# Altium PCB AP33771.PcbDoc
Units mm, origin at the board's own origin, x right, y up, seen from the top; angles counter-clockwise.
Board outline 164 x 114 mm, 8 copper layers (Top Layer, Power, Inner 1, Inner 2, Inner 3, Inner 4, Ground, Bottom Layer), stack 1.564 mm thick; 3 components, 6 nets, 59 pads, 16 vias.
Unrouted connection lines stored in the file: 8.
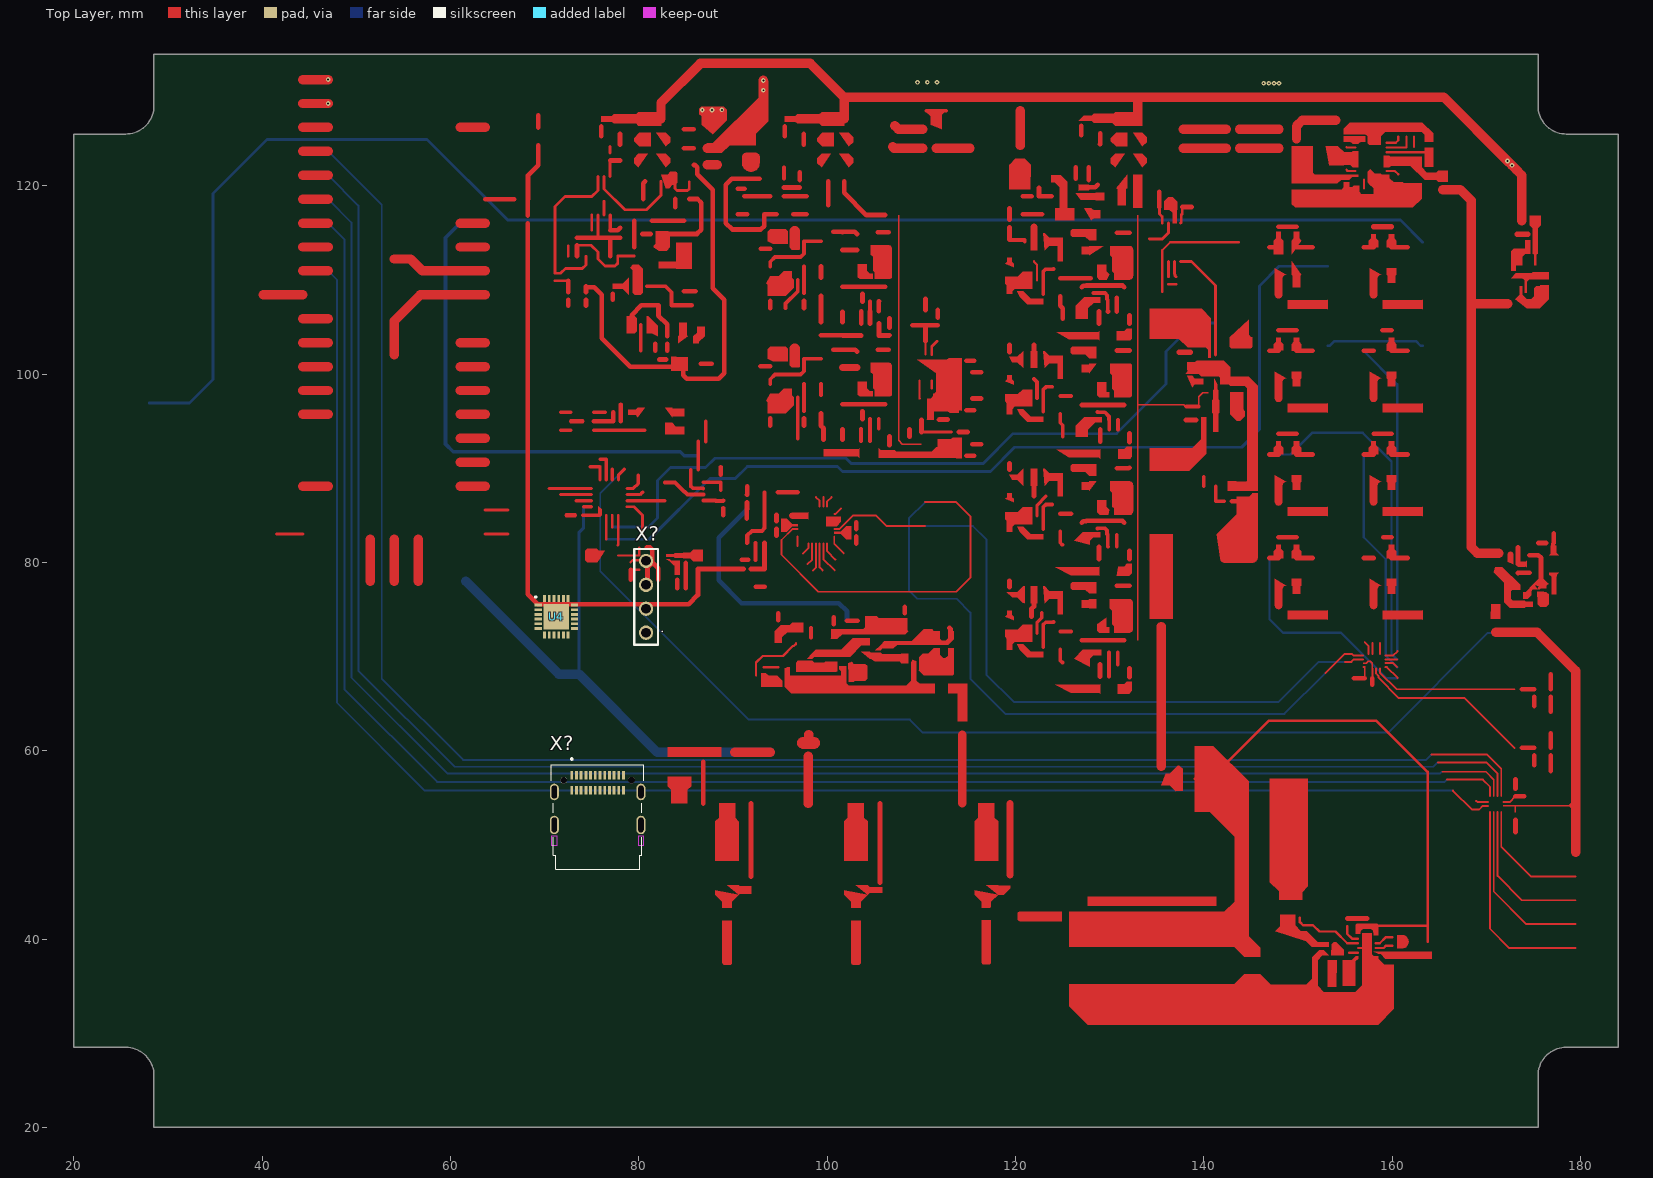
[diagram p0: Top Layer view]
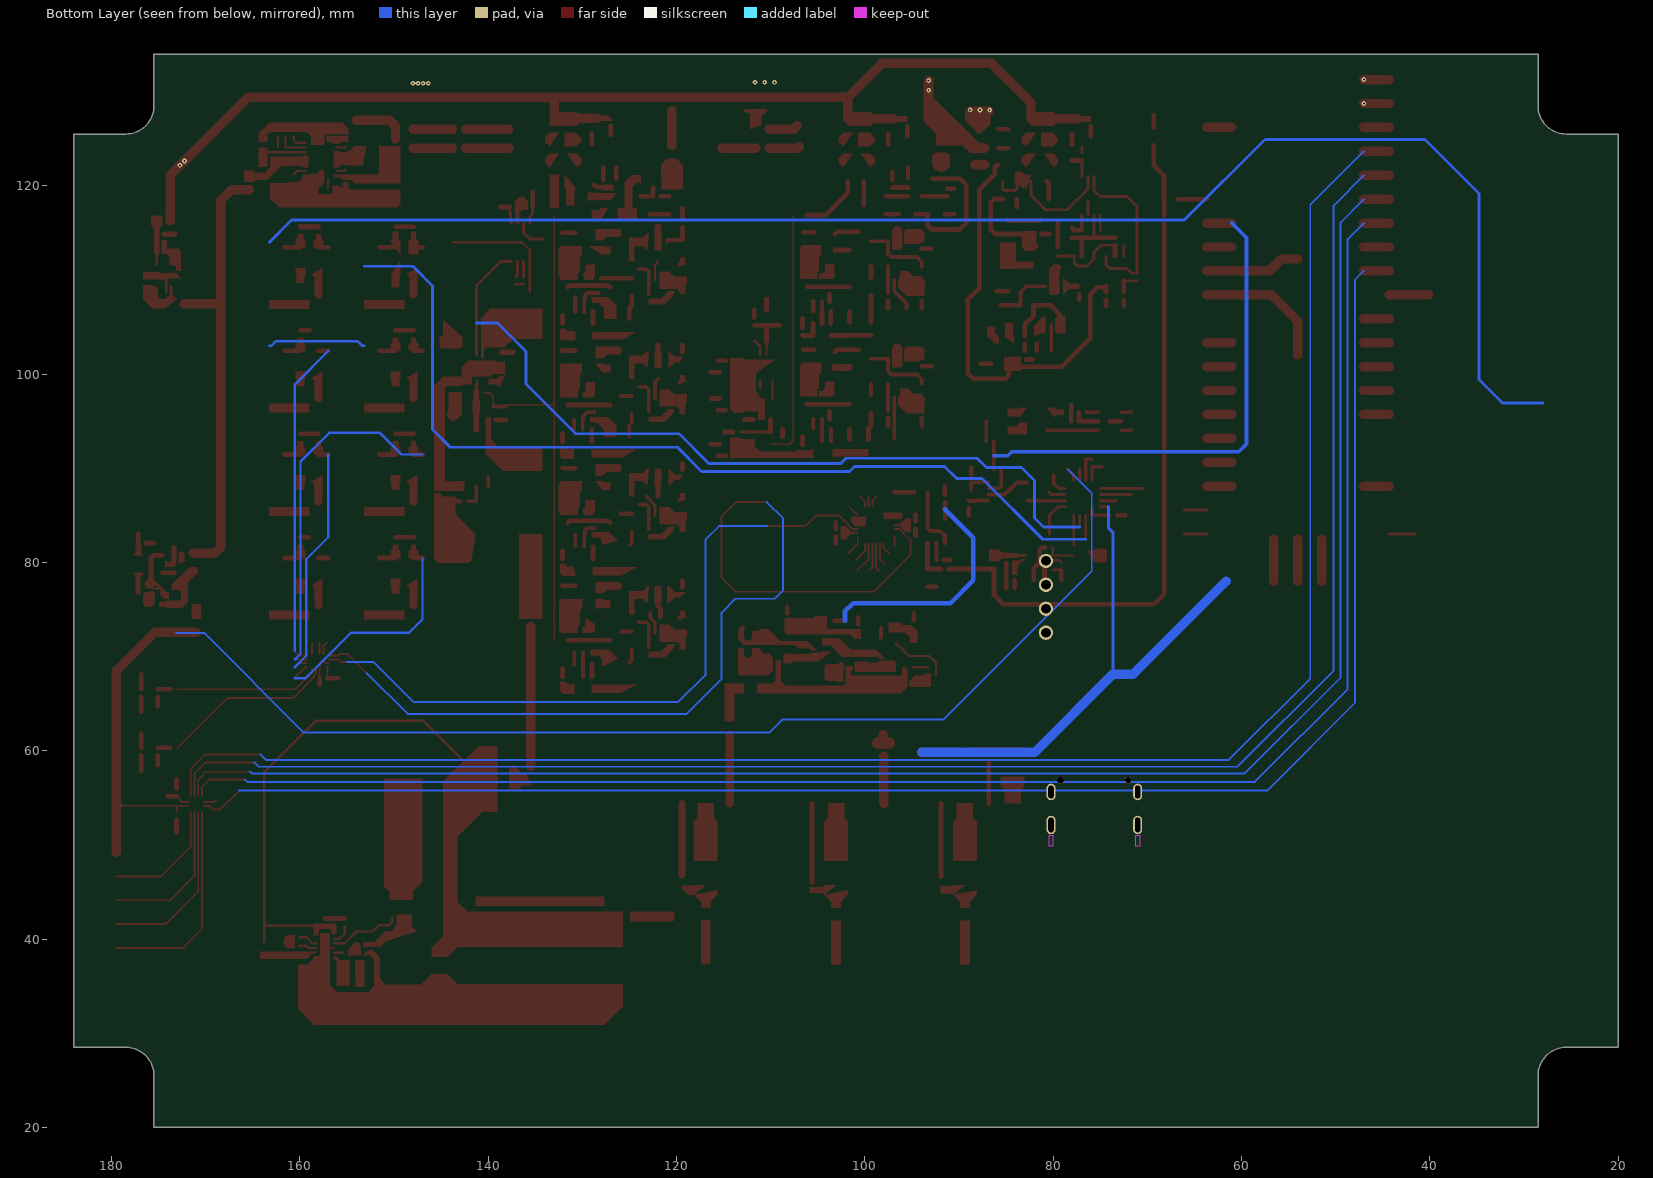
[diagram p1: Bottom Layer view, seen from below]
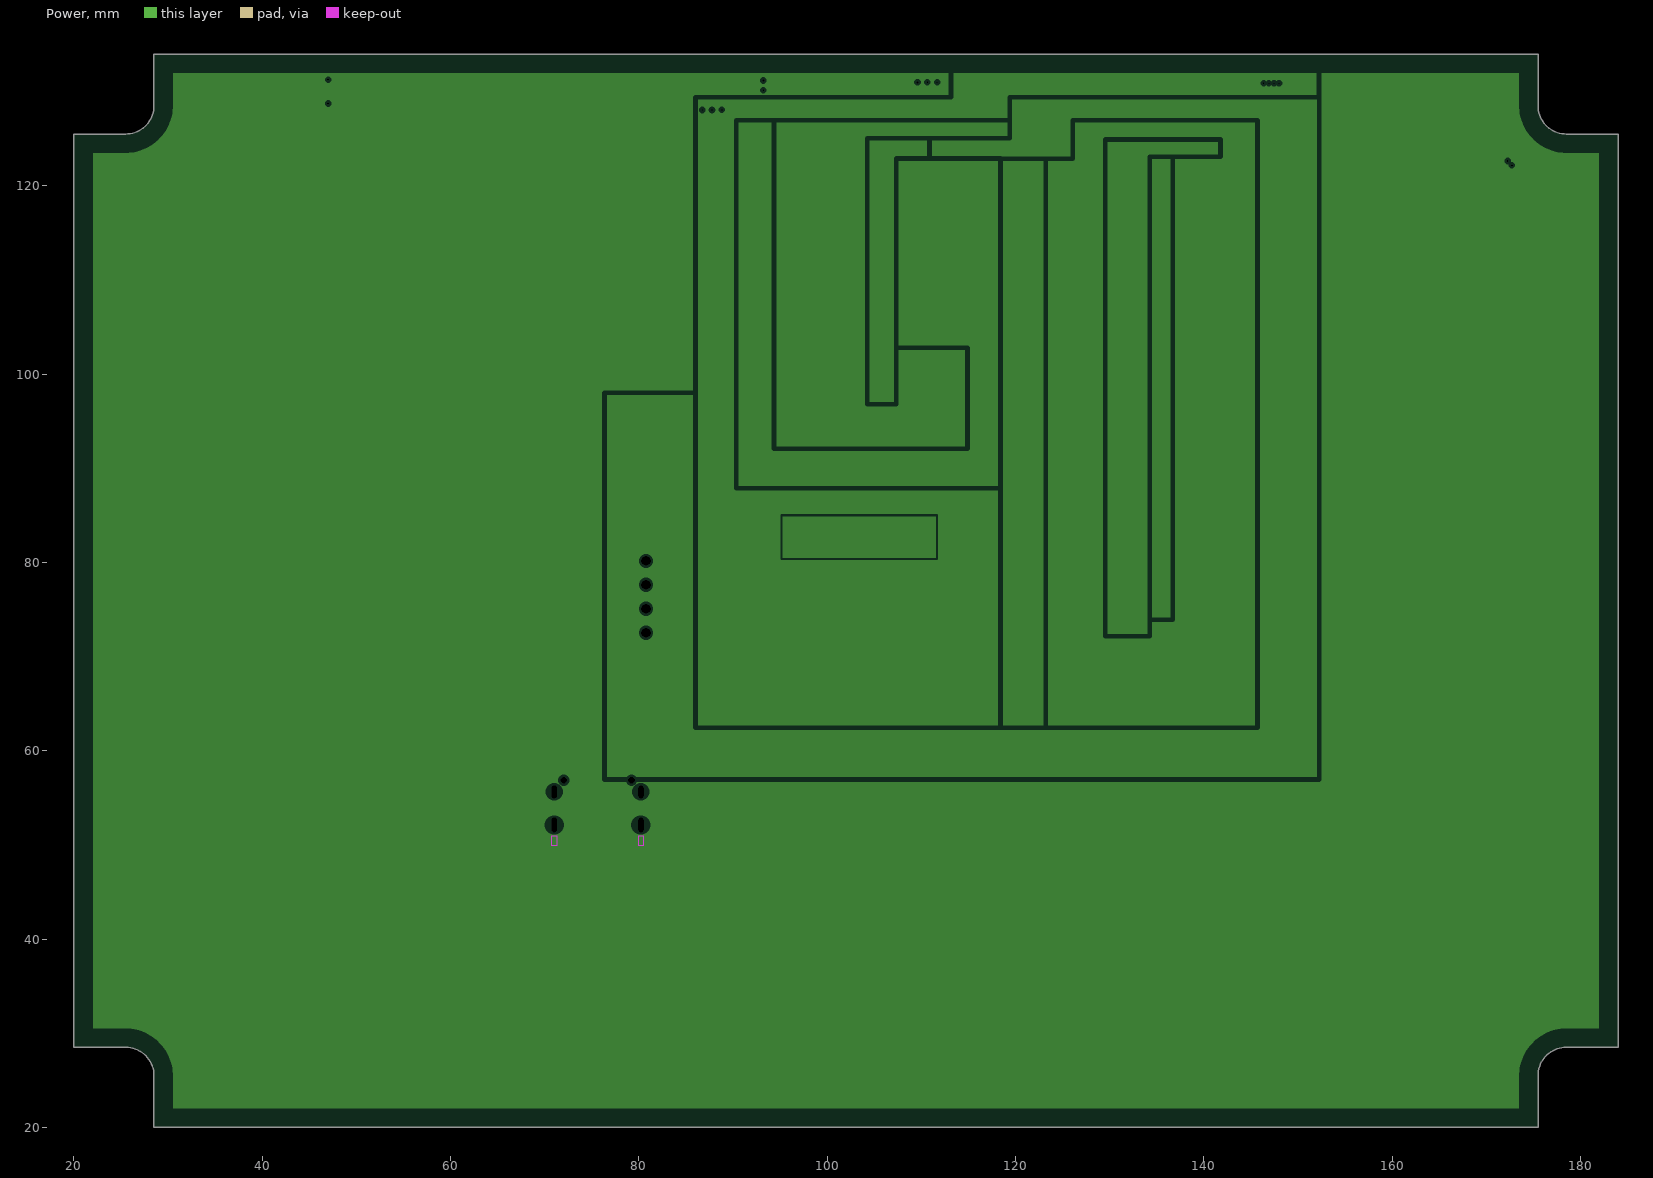
[diagram p2: Power, clearances drawn from the general rule]
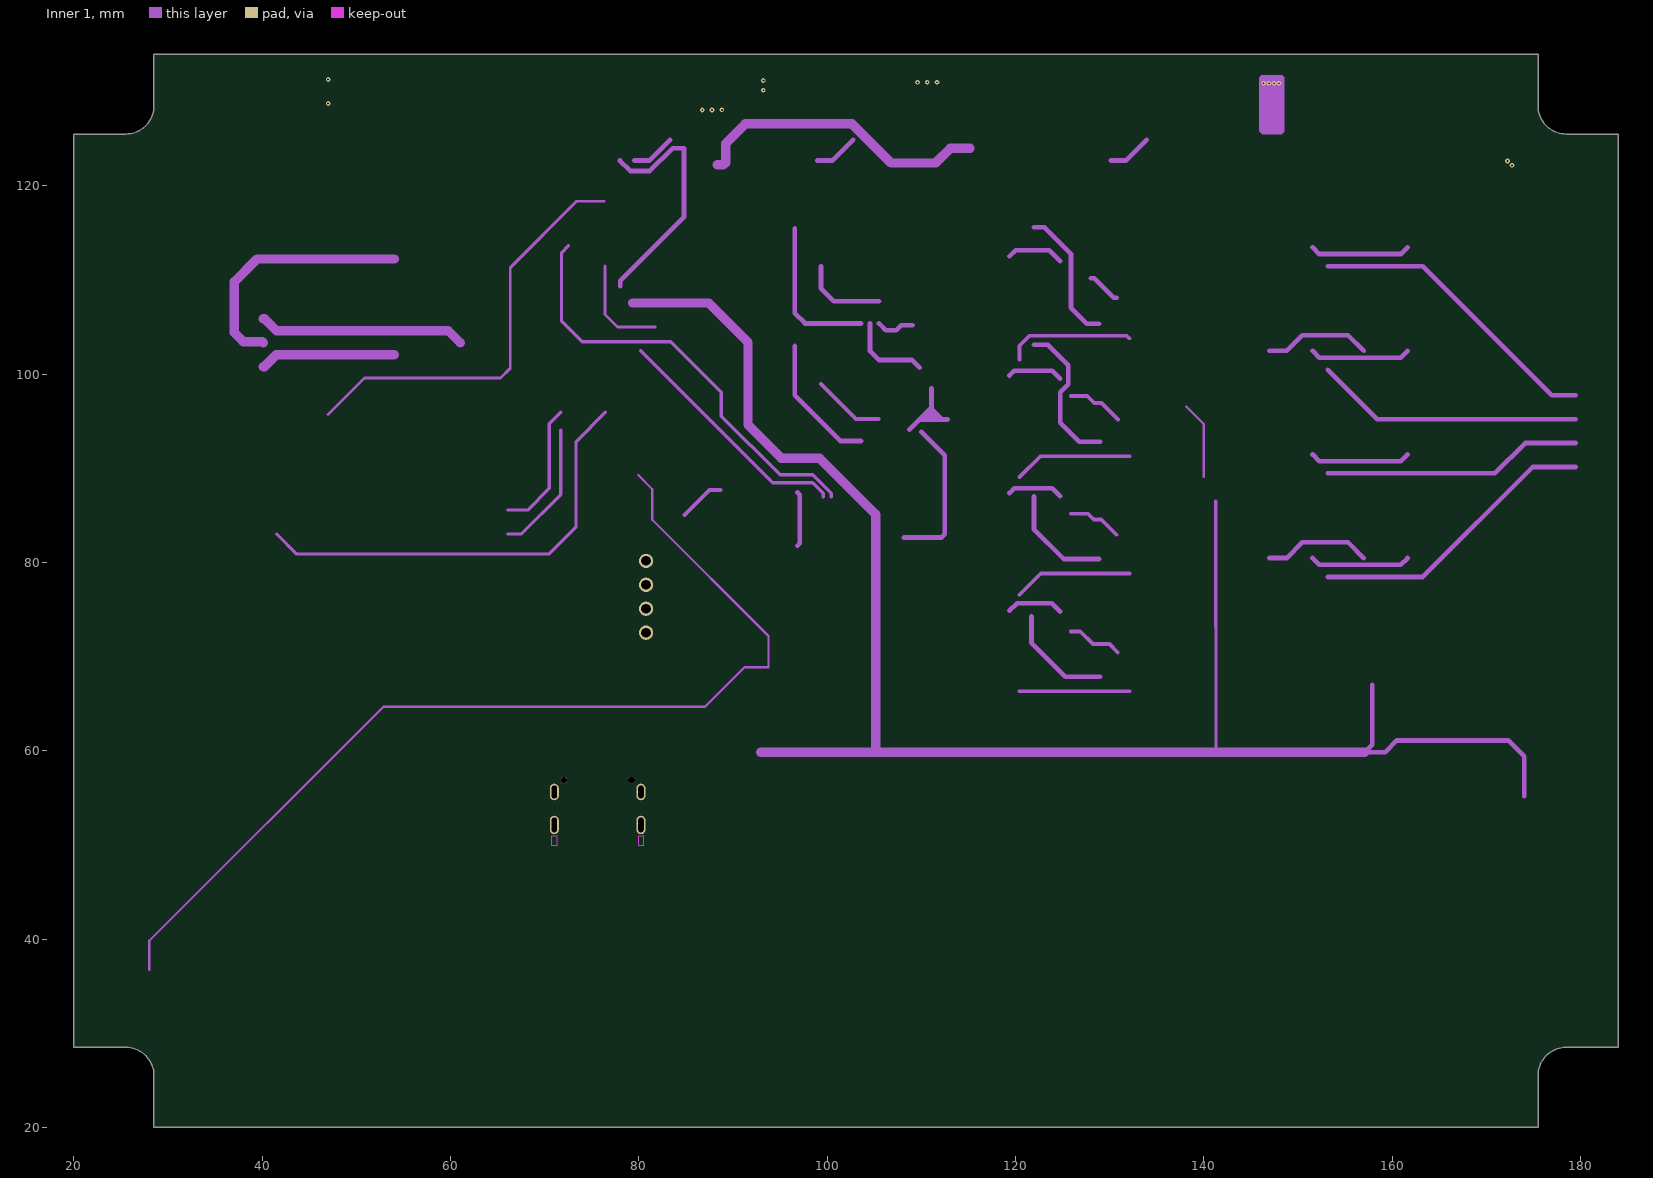
[diagram p3: Inner 1]
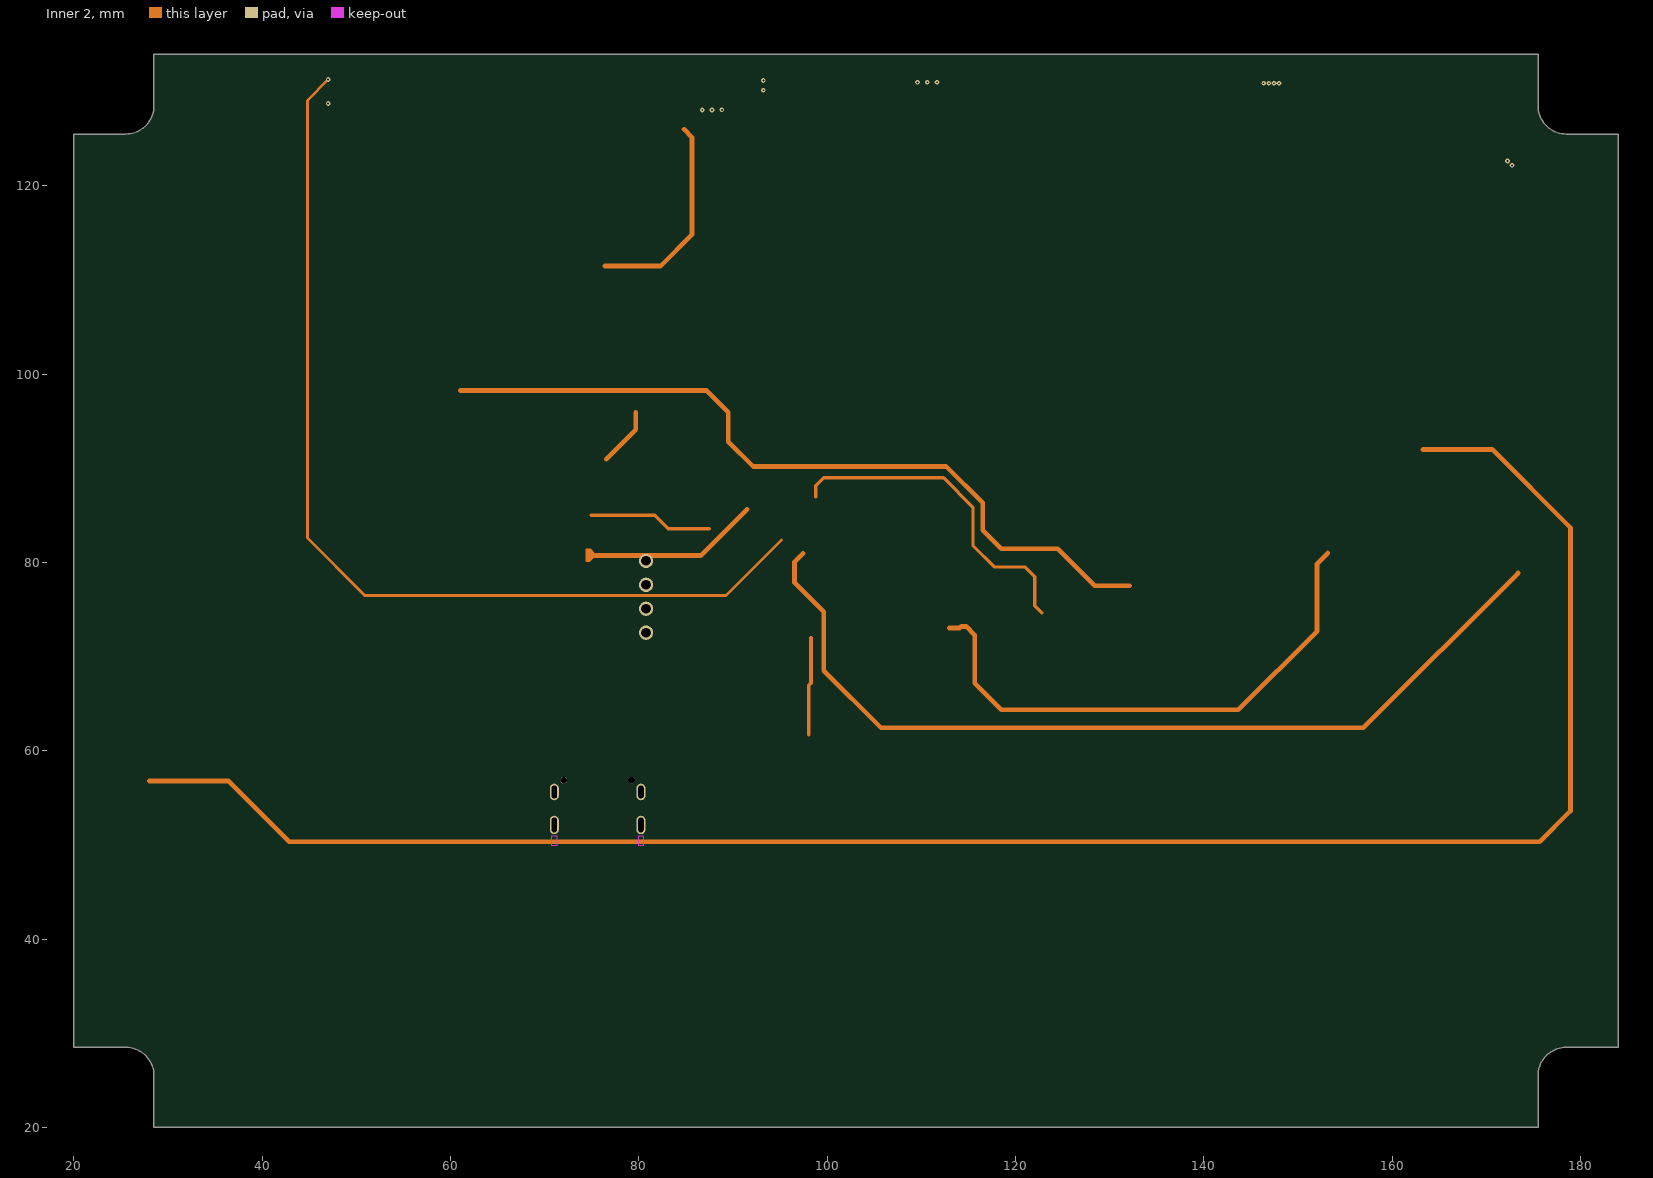
[diagram p4: Inner 2]
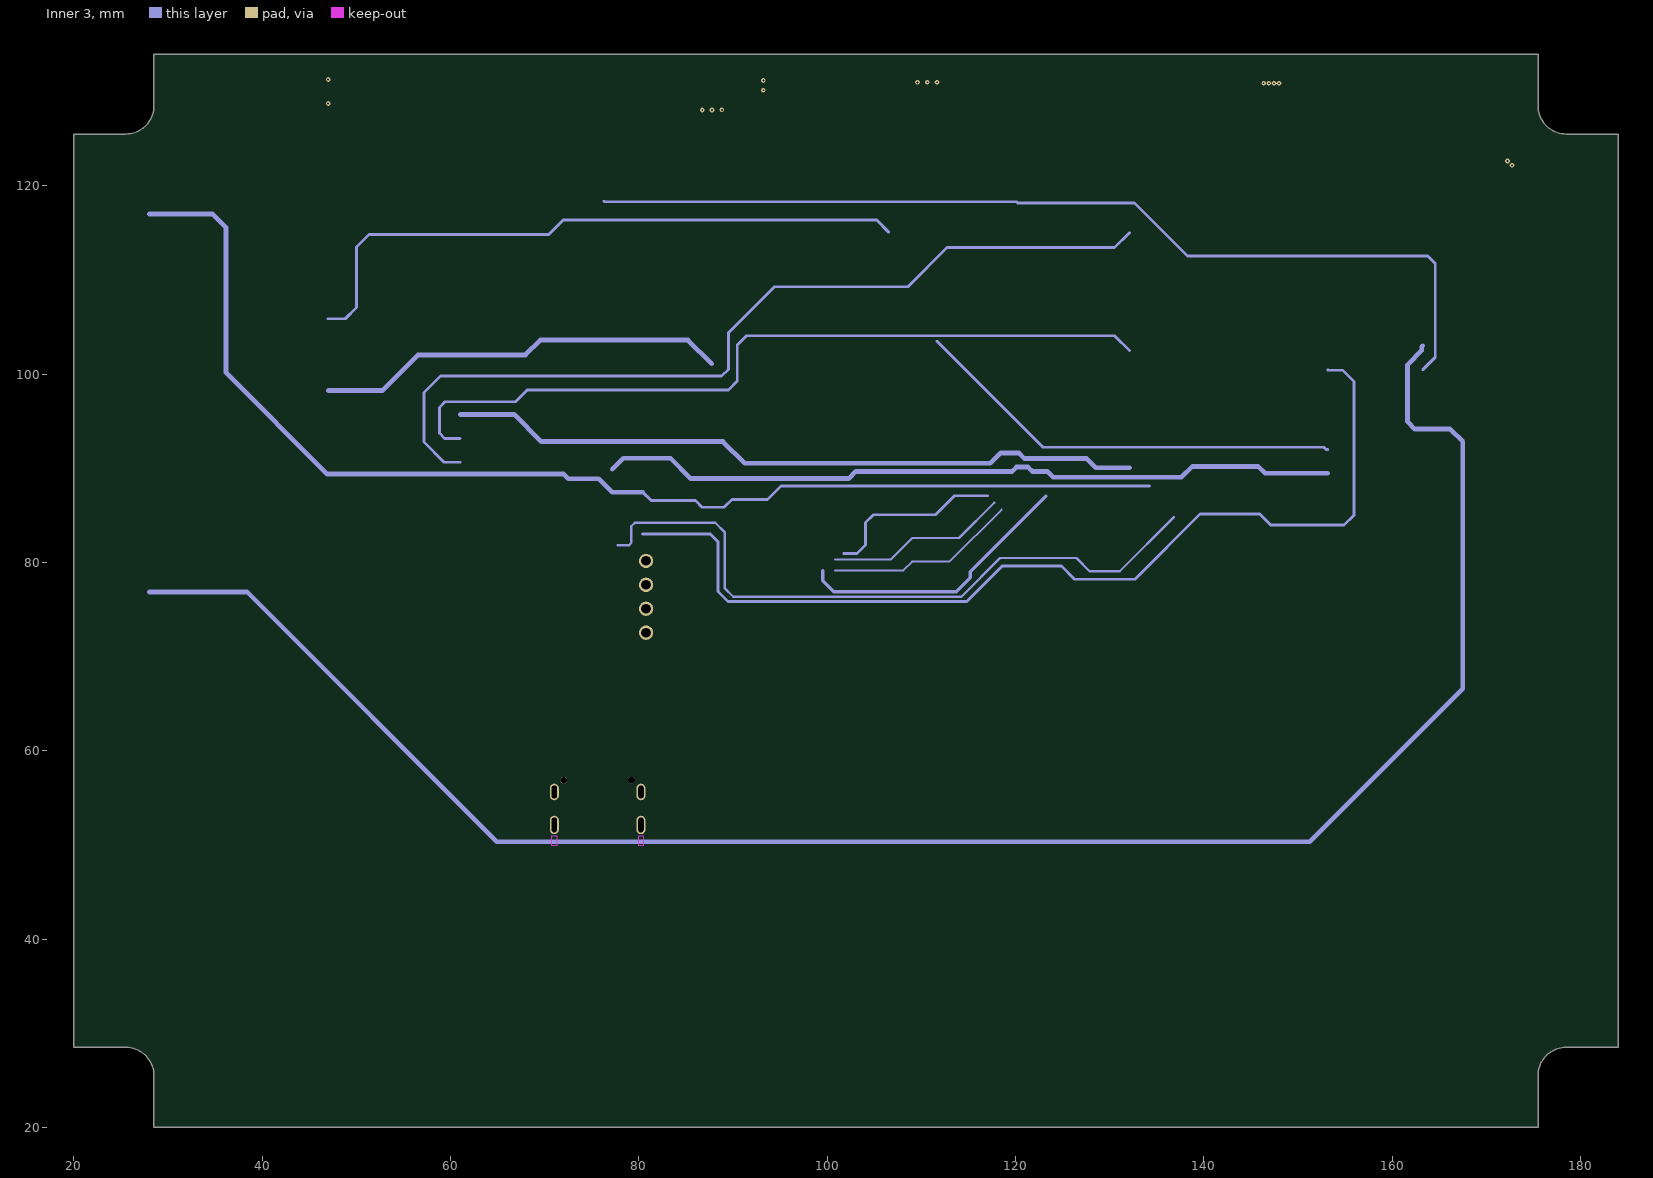
[diagram p5: Inner 3]
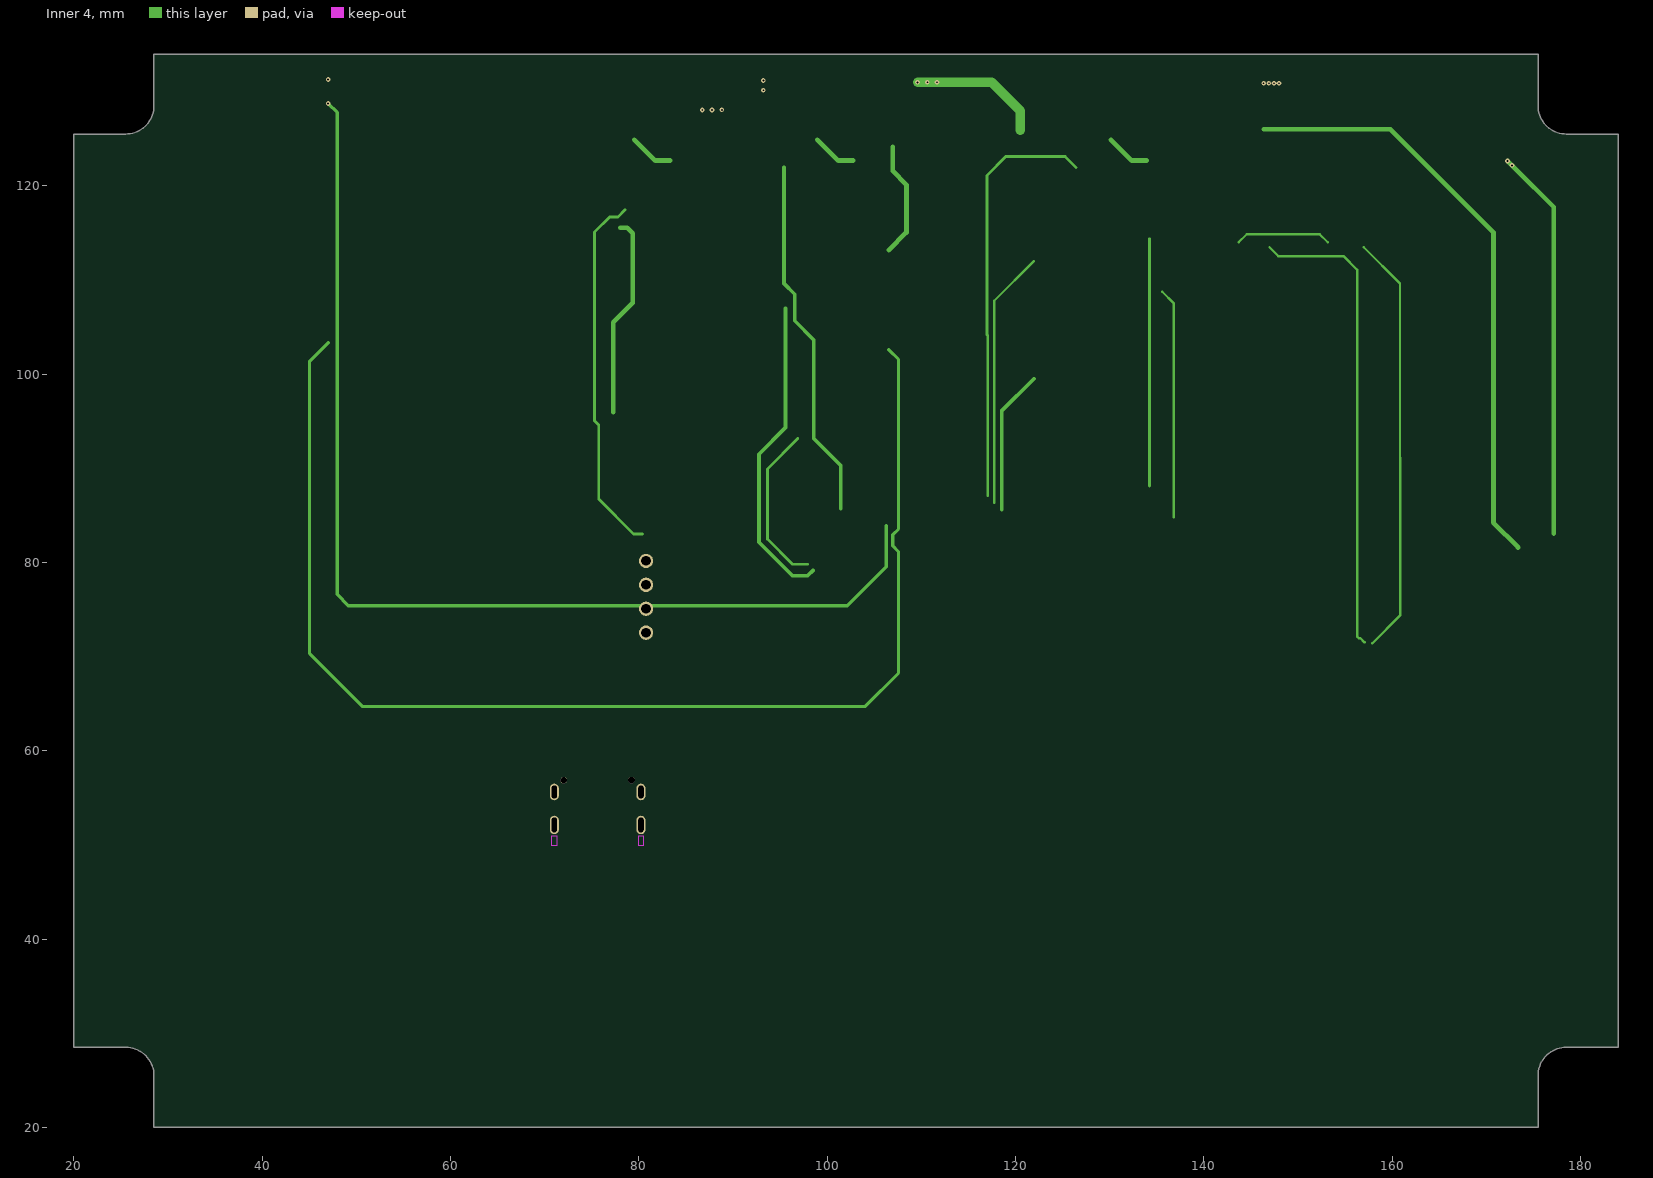
[diagram p6: Inner 4]
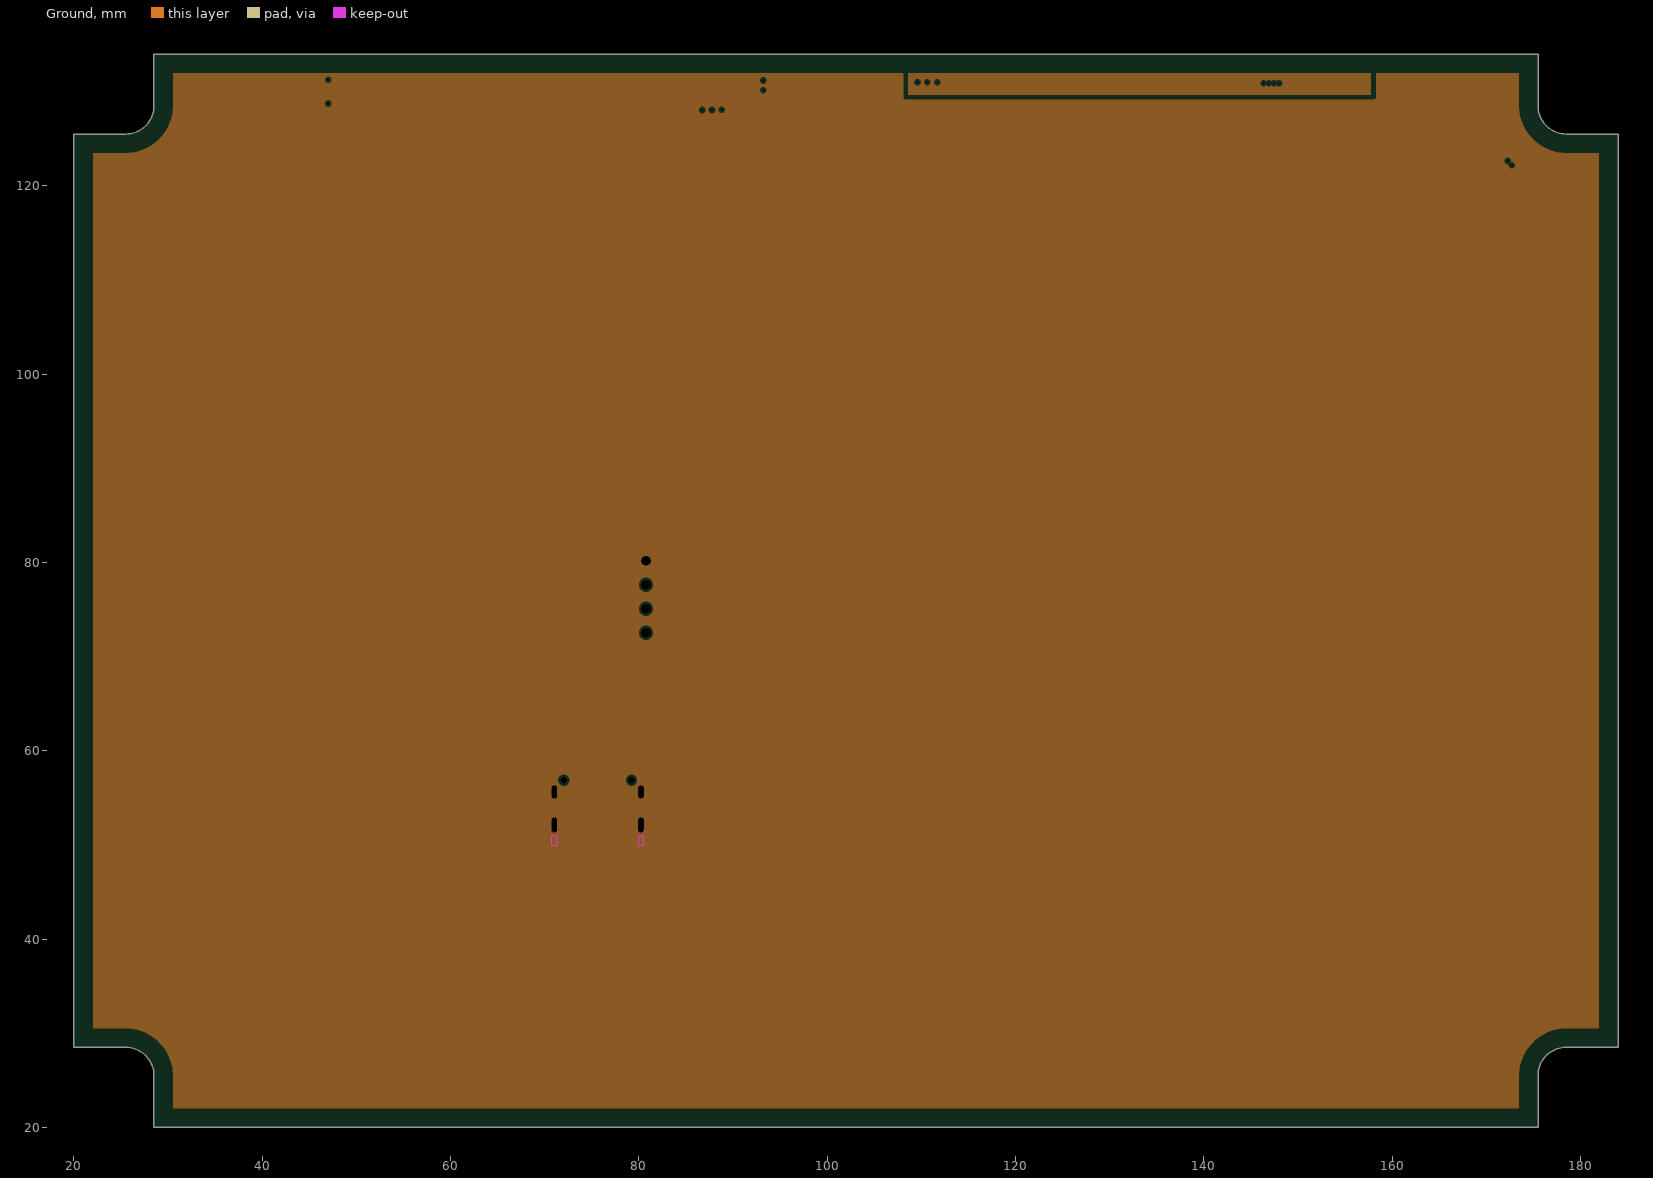
[diagram p7: Ground, clearances drawn from the general rule]

## Layer stack, top to bottom
Top Solder: solder mask 0.0102, Solder Resist, Dk 3.5
Top Layer: signal copper 0.035
Dielectric 1: prepreg 0.114, 1x2116, Dk 4
Power: plane copper 0.035
Dielectric 2: core 0.2, 0.2mm, Dk 4
Inner 1: signal copper 0.035
Dielectric 3: prepreg 0.228, 2x2116, Dk 4
Inner 2: signal copper 0.035
Dielectric 4: core 0.2, 0.2mm, Dk 4
Inner 3: signal copper 0.035
Dielectric 5: prepreg 0.228, 2x2116, Dk 4
Inner 4: signal copper 0.035
Dielectric 6: core 0.2, 0.2mm, Dk 4
Ground: plane copper 0.035, net GND
Dielectric 7: prepreg 0.114, 1x2116, Dk 4
Bottom Layer: signal copper 0.035
Bottom Solder: solder mask 0.0102, Solder Resist, Dk 3.5

## Board outline
20,28.5 25.5,28.5 cw(c25.5,25.5) 28.5,25.5 28.5,20 175.5,20 175.5,25.5 cw(c178.5,25.5) 178.5,28.5 184,28.5 184,125.5 178.5,125.5 cw(c178.5,128.5) 175.5,128.5 175.5,134 28.5,134 28.5,128.5 cw(c25.5,128.5) 25.5,125.5 20,125.5

## Design rules (kind name [scope] priority, off if disabled: settings)
Clearance [All] p1: gap=0.15 ignorepadtopadclearanceinfootprint=TRUE
DiffPairsRouting [All] p1: maxlimit=10 minlimit=0.125 mostfreqgap=0.15 toplayer_minwidth=0.381 toplayer_maxwidth=0.381 toplayer_prefwidth=0.381 midlayer1_minwidth=0.381 midlayer1_maxwidth=0.381 midlayer1_prefwidth=0.381 midlayer2_minwidth=0.381 midlayer2_maxwidth=0.381 midlayer2_prefwidth=0.381 midlayer3_minwidth=0.381 midlayer3_maxwidth=0.381 midlayer3_prefwidth=0.381 midlayer4_minwidth=0.381 midlayer4_maxwidth=0.381 midlayer4_prefwidth=0.381 bottomlayer_minwidth=0.381 bottomlayer_maxwidth=0.381 bottomlayer_prefwidth=0.381 maxuncoupledlength=12.7
FabricationTestPointUsage FabricationTestPointUsage_1 [All] p1: valid=0 allowmultiple=FALSE
FabricationTestpoint FabricationTestpoint_1 [All] p1: side=3 testpointundercomponent=TRUE minsize=1.016 maxsize=2.54 preferedsize=1.524 minholesize=0 maxholesize=1.016 preferedholesize=0.813 testpointgrid=0.025 allowsidetop=TRUE allowsidebottom=TRUE usegrid=TRUE gridtolerance=0
HoleSize [All] p1: absolutevalues=TRUE maxlimit=6 minlimit=0.1 maxpercent=80.000 minpercent=20.000
HoleSize FabricationTestpoint [All] p2 off: absolutevalues=TRUE maxlimit=2.54 minlimit=0.025 maxpercent=80.000 minpercent=20.000
HoleSize FabricationTestPointUsage [All] p3 off: absolutevalues=TRUE maxlimit=2.54 minlimit=0.025 maxpercent=80.000 minpercent=20.000
MinimumSolderMaskSliver [All] p1: minsoldermaskwidth=0.07
MinimumSolderMaskSliver SilkscreenOverComponentPads [All] p2: minsoldermaskwidth=0.254
PlaneClearance [All] p1: clearance=0.254
PlaneConnect [All] p1: planeconnectstyle=Direct reliefexpansion=0.4 reliefentries=4 reliefconductorwidth=0.15 reliefairgap=0.15
PolygonConnect [All] p1: connectstyle=Direct reliefconductorwidth=0.15 reliefentries=4 polygonreliefangle="90 Angle" airgapwidth=0.254
RoutingCorners [All] p1: cornerstyle=45-Degree minsetback=1.25 maxsetback=1.25
RoutingVias [All] p1: holewidth=0.3 width=0.6 viastyle="Through Hole" minholewidth=0.2 minwidth=0.45 maxholewidth=0.45 maxwidth=0.75
SilkToSilkClearance [All] p1: silktosilkclearance=0.15
SilkToSolderMaskClearance [IsPad] p1: minsilkscreentomaskgap=0.12 clearancetoexposedcopper=TRUE
SolderMaskExpansion [All] p1: expansion=0.03 istentingtop=FALSE
Width [All] p1: maxlimit=10 minlimit=0.1 preferedwidth=0.15 toplayer_prefwidth=0.125 midlayer1_minwidth=0.125 midlayer2_minwidth=0.125 midlayer3_minwidth=0.125 midlayer4_minwidth=0.125 bottomlayer_prefwidth=0.125 minimp=50.000000 maximp=50.000000 favimp=50.000000
20 further rules are at their usual default settings.

## Classes and differential pairs
component class AP33771: U4 X?

## Components (designator, comment, footprint, x,y, rotation, side; value= is the part's Value field where it differs from the comment)
U4 "AP33771" W-QFN4040-24 71.24,74.23 r0 top
X? "HMTSW-104-07-G-S-240" HDR_TH_1X4_M_00 80.76,76.35 r90 top value=HDR_TH_1X4_M_00
X? "USBC" 10163259-00011LF 75.62,52.12 r0 top value=10163259-00011LF

## Footprints (in the part's own frame and the unit in brackets; to place one, negate y for a bottom-side part, rotate by r counter-clockwise, add the part's x,y. Pads: shape width x height; smd on the part's side, far side on the other; paste and mask are expansions set on the pad)
10163259-00011LF [mm] "USBC connector"
  rect 0.3x0.9 smd mask+0.05: A1(-2.75,5.3) A2(-2.25,5.3) A3(-1.75,5.3) A4(-1.25,5.3) A5(-0.75,5.3) A6(-0.25,5.3) A7(0.25,5.3) A8(0.75,5.3) A9(1.25,5.3) A10(1.75,5.3) A11(2.25,5.3) A12(2.75,5.3) B1(2.75,3.7) B2(2.25,3.7) B3(1.75,3.7) B4(1.25,3.7) B5(0.75,3.7) B6(0.25,3.7) B7(-0.25,3.7) B8(-0.75,3.7) B9(-1.25,3.7) B10(-1.75,3.7) B11(-2.25,3.7) B12(-2.75,3.7)
  oval 0.96x1.76 hole 0.55 slot 1.35 at 90 deg: SH1(-4.6,3.5) SH2(4.6,3.5)
  oval 0.96x1.96 hole 0.55 slot 1.55 at 90 deg: SH3(-4.6,0) SH4(4.6,0)
  round 0.7 hole 0.7 unplated: ""(-3.6,4.75) ""(3.6,4.75)
  Keep-Out Layer region: 4.85,-2.195 4.35,-2.195 4.35,-1.145 4.85,-1.145
  Keep-Out Layer region: -4.35,-2.195 -4.85,-2.195 -4.85,-1.145 -4.35,-1.145
  silkscreen extent -4.92,-4.7 4.92,7.1, body extent -4.92,-4.7 4.92,6.4, height 5.19
HDR_TH_1X4_M_00 [mil] "Header; 1x4 pins; Male; Straight; Pitch 2.54mm; Samtec HMTSW Series"
  round 60 hole 40 paste-99999 mask+1.97: 1(-150,0) 2(-50,0) 3(50,0) 4(150,0)
  silkscreen extent -200,-50 200,50, body extent -200,-49 200,49, height 340
W-QFN4040-24 [mm] "Diodes inc."
  rect 2.7x2.7 smd paste-2539.97 mask+0.05: 0(0,0)
  rect 0.75x0.3 smd paste-2539.97 mask+0.05: 1(-1.925,1.25) 2(-1.925,0.75) 3(-1.925,0.25) 4(-1.925,-0.25) 5(-1.925,-0.75) 6(-1.925,-1.25) 13(1.925,-1.25) 14(1.925,-0.75) 15(1.925,-0.25) 16(1.925,0.25) 17(1.925,0.75) 18(1.925,1.25)
  rect 0.3x0.75 smd paste-2539.97 mask+0.05: 7(-1.25,-1.925) 8(-0.75,-1.925) 9(-0.25,-1.925) 10(0.25,-1.925) 11(0.75,-1.925) 12(1.25,-1.925) 19(1.25,1.925) 20(0.75,1.925) 21(0.25,1.925) 22(-0.25,1.925) 23(-0.75,1.925) 24(-1.25,1.925)
  silkscreen extent -2.3,2 -2.1,2.2, body extent -1.99,-1.99 1.99,1.99, height 1.4

## Part data
U4: "USB PD SINK CONTROLLER", Manufacturer="Diodes Incorporated", Manufacturer Part Number=AP33771DKZ-13, Supplier Part Number 1=31-AP33771DKZ-13CT-ND, ComponentLink1Description=Datasheet, ComponentLink1URL=https://www.diodes.com/assets/Datasheets/AP33771.pdf, ComponentLink2Description="Supplier Info", ComponentLink2URL=https://www.digikey.de/en/products/detail/diodes-incorporated/AP33771DKZ-13/15995287, Supplier 1=DigiKey
X?: library part HDR_TH_1X4_M_00, "Header; 1x4 pins; Male; Straight; Pitch 2.54mm; Samtec HMTSW Series", Manufacturer="Samtec Inc.", Supplier Part Number 1=HMTSW-104-07-G-S-240-ND, ComponentLink1Description="Supplier Info", ComponentLink1URL=https://www.digikey.de/en/products/detail/samtec-inc/HMTSW-104-07-G-S-240/8450698, ComponentLink2Description=Datasheet, ComponentLink2URL=https://mm.digikey.com/Volume0/opasdata/d220001/medias/docus/6129/hmtsw-xxx-xx-xxx-x-xxxx-xx-xx-mkt.pdf, Manufacturer Part Number=HMTSW-104-07-G-S-240, Supplier 1=Digi-Key
X?: library part 10163259-00011LF, "USB 3.2 TYPE C GEN 2 RECEPTACLE", Manufacturer="Amphenol ICC (FCI)", Supplier Part Number 1=609-10163259-00011LFCT-ND, ComponentLink1Description=Datasheet, ComponentLink1URL=https://cdn.amphenol-cs.com/media/wysiwyg/files/documentation/datasheet/inputoutput/io_usb_type_c_connector_cable.pdf, ComponentLink2Description="Supplier Info", ComponentLink2URL=https://www.digikey.de/en/products/detail/amphenol-cs-fci/10163259-00011LF/18443707, Manufacturer Part Number=10163259-00011LF, Supplier 1=DigiKey

## Via types
v1: diameter 0.508, hole 0.203, Top Layer to Bottom Layer, tented both sides, 16 vias

## Nets (pads, with @x,y where several pads share a name; then routed paths per layer and width w, separated by ;. In a path a pad name is that pad's centre, name@x,y a point inside that pad or via, vN(x,y) a via of type N, cw(c..) or ccw(c..) an arc to the next point about the centre after c; other vN are vias at no path point)
CC1: U4.17 X?.A5
CC2: U4.16 X?.B5
D+: X?.3 X?.A6
D-: X?.2 X?.A7
GND: X?.4 X?.A1 X?.A12 X?.B1 X?.B12 X?.SH1 X?.SH2 X?.SH3 X?.SH4 | length 1.2
  Top Layer w0.45: 72.781,94.988 74,94.988
VBUS: X?.1 X?.A4 X?.A9 X?.B4 X?.B9
pads on no net: U4.0 U4.1 U4.2 U4.3 U4.4 U4.5 U4.6 U4.7 U4.8 U4.9 U4.10 U4.11 U4.12 U4.13 U4.14 U4.15 U4.18 U4.19 U4.20 U4.21 U4.22 U4.23 U4.24 X?. X?.A2 X?.A3 X?.A8 X?.A10 X?.A11 X?.B2 X?.B3 X?.B6 X?.B7 X?.B8 X?.B10 X?.B11
copper on no net: | length 6957.9
  Top Layer w0.15: 107.577,116.892 107.577,109.289 107.577,96.809 107.577,92.973 107.986,92.564 108.749,92.564 108.753,92.568 110.009,92.568 ; 132.987,71.726 132.987,84.226 132.987,96.726 ; 132.987,116.85 132.987,109.225 132.987,96.726 ; 138.134,96.557 138.037,96.557 137.868,96.726 132.987,96.726 ; 139.459,96.557 139.464,96.562 139.464,97.613 139.864,98.013 140.459,98.013 ; 156.933,69.3 156.946,69.313 157.277,69.313 157.464,69.5 157.702,69.5 157.902,69.3 157.902,68.732 ; 171.826,54.144 173.1,54.144 ; 173.1,53.442 173.1,54.144 ; 179.435,59 179.5,59.065 ; 179.5,54.134 179.49,54.144 173.1,54.144
  Top Layer w0.2: 96.85,81.761 96.85,82.761 ; 96.85,83.561 96.328,83.561 95.15,82.383 95.15,80.811 99.071,76.89 113.71,76.89 115.21,78.39 115.21,84.893 113.693,86.41 110.4,86.41 ; 97.439,80.96 98,81.521 98,82.011 ; 97.9,79.811 98.4,80.311 98.4,82.011 ; 98.5,79.15 98.8,79.45 98.8,82.011 ; 98.8,86.94 99.2,86.54 99.2,85.911 ; 99.2,82.011 99.2,79.47 99.52,79.15 ; 99.6,82.011 99.6,80.35 100.8,79.15 ; 99.6,85.911 99.6,86.94 ; 100,82.011 100,81.186 100.875,80.311 ; 100,85.911 100,86.477 100.463,86.94 ; 100.75,82.761 100.75,81.97 101.76,80.96 ; 100.75,83.561 101.325,83.561 102.764,85 105.18,85 106.29,83.89 110.38,83.89 110.4,83.87 ; 100.75,85.161 100.9,85.161 101.45,85.711 ; 152.9,68.25 154.918,70.269 155.744,70.269 155.913,70.1 156.933,70.1 ; 155,69.44 155.684,69.44 155.944,69.7 156.933,69.7 ; 156.933,68.9 157.089,68.9 157.102,68.888 157.102,67.7 ; 157.1,71.54 157.1,71.514 157.502,71.112 157.502,70.269 ; 157.902,67.7 157.902,68.732 ; 157.902,70.269 157.902,71.425 ; 158.302,68.732 158.302,68.204 158.539,67.966 158.539,67.781 160.72,65.6 167.704,65.6 173,60.304 ; 158.702,68.732 158.714,68.719 158.714,68.286 160.472,66.528 173,66.528 ; 158.702,70.269 158.702,71.419 158.708,71.425 ; 159.27,68.9 159.283,68.888 159.452,68.888 160.577,67.762 160.577,67.7 ; 159.27,69.3 160.126,69.3 160.539,68.888 ; 159.27,69.7 160.539,69.7 ; 159.27,70.1 160.089,70.1 160.577,70.589 160.577,70.596 ; 164.2,59.621 170.051,59.621 171.6,58.072 171.6,55.169 ; 164.86,58.77 170,58.77 171.2,57.57 171.2,55.169 ; 165.36,57.77 169.975,57.77 170.8,56.945 170.8,55.169 ; 165.84,56.93 169.65,56.93 170.4,56.18 170.4,55.169 ; 166.46,55.77 168.49,53.74 169.23,53.74 169.634,54.144 170.175,54.144 ; 168.907,54.662 168.991,54.662 169.108,54.544 170.175,54.544 ; 170.4,53.518 170.4,41.1 172.458,39.042 179.5,39.042 ; 170.8,53.518 170.8,45.05 174.268,41.582 179.5,41.582 ; 171.2,53.518 171.2,46.7 173.778,44.122 179.5,44.122 ; 171.6,53.518 171.6,49.8 174.738,46.662 179.5,46.662 ; 171.826,54.544 172.475,54.544 173.1,55.169
  Top Layer w0.24: 77.778,80.734 80.03,80.734 80.03,81.584 ; 79.124,79.234 80.03,79.234 ; 79.124,80.034 79.317,80.227 80.023,80.227 80.03,80.234 ; 92.45,67.995 92.45,68.864 92.45,69.364 93.15,70.064 95.299,70.064 96.35,71.115 96.459,71.115 96.69,71.346 96.69,71.455 ; 93.25,68.864 93.77,68.864 94.81,68.864 ; 155.15,121.696 155.27,121.576 156.125,121.576 ; 155.15,124.101 155.175,124.076 156.125,124.076 ; 157.025,119.725 157.025,120.676 ; 159.425,121.576 160.295,121.576 160.65,121.22 ; 159.425,123.576 163.825,123.576 163.9,123.65 ; 159.425,124.076 161.475,124.076 161.525,124.125 161.525,125.2 ; 159.425,124.576 160.387,124.576 160.65,124.838 160.65,125.2 ; 162.325,124.125 162.325,125.2
  Top Layer w0.25: 109.8,99.287 109.8,97.437 ccw(c109.828,97.437) 109.828,97.409 ; 110.45,102.087 110.45,103.496 ; 111.092,98.51 111.092,99.287 111.1,99.287 ; 121.963,112.015 121.963,111.945 122.288,111.62 122.288,109.97 ; 150.205,42.292 150.205,41.8 150.53,41.475 151.6,41.475 152.275,40.8 153.98,40.8 155.23,39.55 156.38,39.55 ; 155.243,41.375 155.243,40.55 155.743,40.05 156.38,40.05 ; 155.43,38.55 156.38,38.55 ; 156.38,39.05 157.08,39.05 157.33,39.3 ; 158.28,39.05 159.105,39.05 159.355,39.3 160.05,39.3 ; 158.28,39.55 158.68,39.55 159.305,40.175 160.022,40.175
  Top Layer w0.254: 77.778,81.834 77.804,81.86 77.804,84.987 77.83,85.013 ; 135.594,108.75 135.594,113.159 136.435,114 141.259,114 143.7,114 ; 139.03,57 140.68,58.65 142.35,58.65 146.871,63.171 158.349,63.171 163.77,57.75 163.77,41.4 ; 158.11,41.4 163.77,41.4 ; 163.77,39.7 163.77,41.4
  Top Layer w0.3: 71.1,109.923 72.495,109.923 ; 72.495,112.514 72.495,113.621 ; 73.425,113.694 74.927,113.694 75.65,112.971 75.65,112.236 76.402,111.484 77.457,111.484 77.75,111.778 77.75,112.53 77.755,112.535 79.504,112.535 79.509,112.54 ; 74.375,112.514 74.375,111.6 73.994,111.219 72.195,111.219 71.7,110.723 71.1,110.723 71.1,117.79 72.165,118.855 74.989,118.855 75.65,119.516 75.65,121 ; 75,115.294 75,116.911 ; 75.6,114.494 75.65,114.544 75.65,116.911 ; 76.3,116.911 76.3,118.355 ; 76.3,121 76.3,119.678 78.523,117.455 80.812,117.455 82.353,118.997 82.353,120.483 ; 76.53,82.466 76.53,85.013 ; 76.95,121 76.95,122.683 ; 76.95,123.483 76.95,124.186 ; 77.178,83.779 77.179,83.78 77.179,85.012 77.18,85.013 ; 78.73,85.913 79.477,85.913 80.377,85.013 80.377,83.02 ; 83.853,120.402 83.853,119.702 84.053,119.502 85.177,119.502 85.353,119.677 85.353,120.402 ; 111.1,102.087 111.1,102.926 111.67,103.496 ; 134.24,114.38 134.258,114.362 135.596,114.362 136.244,115.009 136.244,116.045 ; 135.282,117.75 135.282,117.025 135.458,116.849 135.463,116.849 135.594,116.718 135.594,116.045 ; 136.244,109.55 137.052,109.55 ; 136.244,110.35 136.244,111.955 ; 136.894,111.955 136.894,110.626 136.952,110.568 136.952,110.45 137.052,110.35 ; 137.544,111.955 138.704,111.955 141.259,109.4 141.259,108.3 141.259,105.423 141.259,102.023 ; 137.544,116.045 137.61,116.111 137.61,116.929 137.706,117.025 137.706,117.75
  Top Layer w0.35: 41.522,83.02 44.32,83.02 ; 63.7,83.02 66.09,83.02 ; 63.7,85.56 66.09,85.56 ; 70.489,87.863 74.98,87.863 ; 71.71,87.213 74.98,87.213 ; 71.71,95.938 72.781,95.938 ; 72.781,94.038 72.78,94.039 71.711,94.039 ; 73.329,86.563 74.98,86.563 ; 74.029,85.013 74.954,85.013 75.88,85.013 ; 74.129,85.913 74.98,85.913 ; 74.845,90.17 75.88,90.17 75.88,88.763 ; 75.219,95.938 76.449,95.938 ; 75.88,90.97 76.53,90.97 76.53,88.763 ; 76.95,115.294 76.95,116.911 ; 77.18,88.763 77.18,89.895 ; 77.83,88.763 77.83,89.276 78.449,89.895 ; 78.73,86.563 82.755,86.563 ; 78.73,87.213 80.13,87.213 80.377,87.46 80.42,87.46 ; 78.73,87.863 79.413,87.863 79.93,88.38 79.93,89.276 ; 80.203,102.482 80.203,105.247 ; 110.009,93.864 113.196,93.864 ; 122.288,72.471 122.288,73.65 122.777,74.138 122.777,74.656 ; 122.288,84.971 122.288,86.075 123.229,87.016 ; 141.259,88.122 141.259,86.5 142.196,86.5 ; 71.71,94.04 71.711,94.039
  Top Layer w0.4: 75.219,94.038 80.6,94.038 ; 80.853,109.336 82.841,109.336 83.48,108.698 83.48,107.31 ; 85.5,89.838 85.5,88.113 85.734,87.879 86.829,87.879 86.845,87.863 ; 86.3,89.838 86.3,91.338 86.3,92.838 ; 86.845,88.513 88.685,88.513 88.685,87.701 ; 87.1,92.838 87.1,94.988 ; 93.954,98.954 93.954,99.454 94.449,99.949 97.169,99.949 97.529,100.308 97.529,101.643 98.451,101.644 99.336,101.644 ; 93.954,111.434 93.954,111.934 94.449,112.429 97.169,112.429 97.529,112.788 97.529,114.124 98.451,114.124 99.336,114.124 ; 95.41,120.761 95.41,121.963 ; 95.579,106.987 95.579,107.489 96.879,108.789 96.879,110.034 ; 96.878,93.152 96.878,96.308 ; 96.879,96.309 96.879,97.554 ; 97.528,96.099 97.528,97.554 97.528,98.954 ; 97.529,108.579 97.529,110.034 97.529,111.434 ; 98.29,71.998 98.29,73.07 ; 99.336,97.759 99.336,98.96 ; 103.606,92.907 103.606,94.202 ; 104.546,106.682 104.546,107.715 ; 104.546,92.907 104.546,94.202 104.546,95.235 ; 105.486,94.202 105.486,95.235 ; 110.545,127.98 111.585,127.98 112.625,127.98 ; 119.363,114.259 120.973,114.259 120.988,114.243 120.988,114.059 ; 121.963,99.516 121.963,99.486 122.288,99.161 122.288,97.471 ; 122.489,119.768 122.496,119.761 ; 122.938,71.016 122.938,72.471 122.954,72.487 122.954,73.396 123.208,73.65 124.022,73.65 124.043,73.671 ; 122.938,83.516 122.938,84.971 122.954,84.987 122.954,85.875 123.229,86.15 123.868,86.15 123.888,86.171 ; 122.938,96.016 122.938,97.471 122.954,97.487 122.954,98.375 123.229,98.65 123.868,98.65 123.888,98.671 ; 122.938,108.515 122.938,109.97 122.954,109.986 122.954,110.915 123.189,111.149 124.022,111.149 124.043,111.17 ; 124.746,70.776 124.746,69.594 124.971,69.369 125.026,69.369 ; 124.746,72.676 125.896,72.676 ; 124.746,83.276 124.746,82.094 124.971,81.869 125.026,81.869 ; 124.746,95.776 124.746,94.843 125.026,94.563 125.026,93.369 ; 124.746,97.676 125.896,97.676 ; 128.273,108.617 129.498,108.617 129.732,108.382 129.732,107.95 129.807,107.875 ; 128.713,83.618 128.721,83.626 129.498,83.626 129.732,83.392 129.732,83.01 129.812,82.93 129.812,81.665 129.817,81.66 ; 128.713,95.976 128.733,95.956 129.492,95.956 129.946,95.502 129.946,95.162 129.956,95.152 129.956,94.119 ; 129.812,106.664 129.812,107.87 ; 129.916,70.435 129.921,70.43 129.921,69.165 129.926,69.16 129.926,67.864 ; 130.757,81.66 130.757,82.93 ; 130.866,69.16 130.866,70.435 ; 130.896,94.119 130.896,95.152 ; 138.134,96.557 139.459,96.557 ; 139.989,88.122 139.989,89.104
  Top Layer w0.43: 86.845,86.563 86.846,86.562 88.157,86.562 88.189,86.53 88.21,86.53 88.225,86.545 88.944,86.545 88.96,86.561 ; 86.845,87.213 85.146,87.213 84.821,87.538 84.8,87.538 83.826,88.512 82.756,88.512 ; 88.96,85.011 88.96,85.761 ; 91.47,82.066 ccw(c91.47,82.106) 91.51,82.106 91.51,82.861 92.01,83.361 93.069,83.361 93.349,83.641 93.349,84.657 93.349,87.44 ; 92.409,80.28 92.409,80.968 92.409,82.066 ; 82.755,88.513 82.756,88.512
  Top Layer w0.45: 72.309,85.013 73.229,85.013 ; 78.075,94.988 78.075,95.938 78.075,96.785 ; 88.685,89.313 88.685,90.138
  Top Layer w0.5: 63.7,118.58 66.764,118.58 ; 68.186,116.04 68.186,76.634 69.274,75.546 85.278,75.546 86.278,76.546 86.278,79.311 91.109,79.311 ; 68.186,116.84 68.186,118.58 68.218,118.612 68.218,121.088 68.25,121.12 69.3,122.17 69.3,124.3 ; 69.3,126.2 69.3,127.488 69.32,127.508 69.32,127.51 ; 72.495,107.261 72.495,107.911 ; 72.495,108.711 72.495,109.923 ; 73.425,113.694 73.43,113.689 73.43,112.519 73.435,112.514 ; 73.425,114.494 74.375,114.494 75,114.494 75.6,114.494 76.1,114.494 76.95,114.494 ; 74.375,107.261 74.375,107.911 ; 74.375,108.711 74.375,109.317 74.456,109.236 75.25,109.236 76.06,108.426 76.06,103.81 79.08,100.79 83.76,100.79 ; 75.219,94.988 75.22,94.989 76.449,94.989 76.45,94.99 76.451,94.989 77.274,94.989 ; 76,125.281 76,126.306 ; 76.95,112.53 76.95,114.494 ; 76.95,115.294 77.773,115.294 78.023,115.544 78.025,115.544 ; 76.95,122.683 77.987,122.683 ; 77.225,107.886 77.225,108.536 ; 77.274,94.989 77.274,95.938 ; 78,124.352 78,125.506 ; 78.025,114.494 76.95,114.494 ; 79.124,78.159 79.124,79.234 ; 79.23,105.89 79.23,106.263 80.275,107.308 82.078,107.308 82.08,107.31 82.08,106.212 83.004,105.288 83.004,104.02 ; 79.503,116.305 79.506,116.302 79.506,113.483 79.509,113.48 ; 80.349,114.894 81.253,114.894 ; 80.453,118.605 80.453,120.283 80.653,120.483 ; 80.83,81.584 81.185,81.584 81.436,81.333 81.436,80.026 81.478,79.984 ; 80.909,78.159 80.909,79.415 81.478,79.984 ; 81.403,116.305 84.803,116.305 ; 81.743,102.482 81.743,103.22 ; 82.063,78.159 82.063,79.398 81.478,79.984 ; 82.18,101.55 82.9,101.55 ; 83.004,102.482 83.004,103.22 ; 83.004,114.894 86.164,114.894 86.62,115.35 86.62,118.208 86.227,118.602 85.353,118.602 ; 83.48,107.308 85.628,107.308 ; 83.853,117.735 83.853,118.602 ; 83.853,120.402 83.853,121.286 ; 84.078,77.27 84.078,78.159 ; 84.678,101.1 84.71,101.068 84.71,99.9 85.11,99.5 88.5,99.5 89.08,100.08 89.08,107.89 87.863,109.107 87.863,119.565 86.189,121.239 86.189,121.97 85.939,122.22 85.839,122.22 ; 84.803,108.8 86.01,108.8 ; 84.803,124 85.84,124 ; 84.803,126 85.838,126 ; 84.978,77.27 84.978,79.934 ; 86.578,101.1 86.579,101.101 87.729,101.101 87.73,101.103 ; 86.836,54.4 86.838,54.402 86.838,58.818 86.84,58.82 ; 90.51,116.981 91.51,116.981 ; 90.51,119.68 91.21,119.68 ; 90.92,80.28 91.609,80.28 ; 91.21,118.88 91.909,118.88 ; 91.47,84.657 91.47,85.634 91.495,85.659 91.495,85.661 91.495,86.401 ; 91.495,87.201 91.518,87.225 91.518,88.077 91.52,88.079 ; 91.909,79.311 93.36,79.311 93.355,79.317 93.355,82.06 93.349,82.066 ; 91.91,118.881 92.819,118.881 93.954,118.881 ; 91.916,46.607 91.916,54.4 ; 92.42,77.411 93.36,77.411 ; 92.819,120.761 89.871,120.761 89.24,120.13 89.24,116.05 89.92,115.37 92.95,115.37 93.31,115.73 93.31,116.981 94.61,116.981 ; 92.92,100.843 93.953,100.843 ; 92.941,113.324 93.954,113.324 ; 93.95,95.3 93.952,95.298 93.952,94.542 93.954,94.541 ; 93.954,106.987 93.954,107.779 ; 94.622,82.836 94.622,83.561 ; 94.622,84.361 94.622,85.061 ; 94.772,87.44 96.85,87.44 ; 94.81,73.87 94.81,74.61 ; 95.41,118.881 97.801,118.881 ; 95.41,119.821 96.347,119.821 97.079,119.821 ; 95.5,125.281 95.5,126.306 ; 96.41,116.981 97.801,116.981 ; 97.079,120.621 97.079,121.432 ; 97.5,124.352 97.5,125.506 ; 97.528,94.541 97.528,95.299 ; 97.529,106.987 97.529,107.779 ; 99.336,95.859 99.336,94.52 99.616,94.24 99.616,93.052 ; 99.336,104.132 101.636,104.132 101.656,104.112 103.586,104.112 103.606,104.091 ; 99.336,105.532 99.336,108.339 ; 99.336,110.239 99.336,111.434 ; 100.101,117.931 100.101,120.483 ; 100.651,102.593 101.636,102.593 102.972,102.593 103.172,102.393 ; 100.651,115.113 100.652,115.111 101.598,115.111 101.636,115.074 101.674,115.113 102.933,115.113 103.172,114.874 ; 100.71,73.45 100.71,74.19 ; 101.636,93.052 101.636,94.152 ; 101.636,96.809 106.154,96.809 ; 101.636,105.532 101.636,106.632 ; 101.636,109.289 106.154,109.289 ; 101.636,113.174 103.172,113.174 ; 101.801,120.483 101.801,119.263 104.172,116.892 106.154,116.892 ; 102.115,73.805 103.217,73.805 ; 103.1,82.011 103.1,82.761 ; 103.1,83.561 103.1,84.261 ; 103.606,105.387 103.606,106.682 ; 103.746,107.715 103.746,108.539 ; 103.746,95.235 103.746,96.059 ; 104.546,105.387 104.546,106.682 ; 105.372,102.593 106.541,102.593 ; 105.372,115.074 106.541,115.074 ; 105.485,104.091 105.504,104.11 ; 105.485,106.682 105.485,107.716 105.506,107.737 105.506,107.739 ; 105.506,105.387 105.504,105.385 105.504,104.11 ; 105.602,46.007 105.602,54.4 ; 106.616,104.132 106.595,104.112 105.506,104.112 105.504,104.11 ; 106.616,104.932 106.616,105.907 ; 106.616,92.452 106.616,93.367 ; 108.25,74.6 108.25,75.26 ; 108.749,93.364 108.752,93.367 108.752,94.128 108.753,94.13 ; 109.06,105.207 110.45,105.207 ; 110.009,93.864 110.009,95.159 ; 110.45,103.496 110.45,105.207 ; 110.45,106.807 110.45,108.02 ; 111.75,105.207 110.45,105.207 ; 111.75,106.007 111.75,106.807 ; 111.888,95.159 111.916,95.186 112.815,95.186 112.817,95.188 ; 112.989,73.044 112.991,73.044 113.095,72.94 113.095,72.445 113.145,72.395 ; 113.996,93.864 114.9,93.864 ; 114.8,91.327 115.621,91.327 ; 114.8,96.15 115.621,96.15 ; 114.8,101.422 115.621,101.422 ; 115.396,92.568 116.353,92.568 ; 115.396,97.409 116.353,97.409 ; 115.396,100.187 116.353,100.187 ; 119.363,77.36 119.363,78.035 ; 119.364,89.86 119.364,90.511 ; 119.364,102.36 119.364,103.11 ; 119.363,114.259 119.363,115.609 ; 119.363,116.409 119.363,117.631 ; 120.773,116.981 122.82,116.981 ; 120.773,118.879 121.704,118.879 ; 121.698,74.25 121.699,74.251 121.699,75.057 121.963,75.321 121.963,75.671 ; 121.963,87.016 121.963,88.171 ; 121.963,101.985 121.963,103.11 ; 122.496,119.761 122.496,118.887 122.504,118.879 123.824,118.879 ; 124.746,85.176 125.896,85.176 ; 124.746,108.275 124.746,107.256 125.026,106.976 125.026,105.868 ; 124.746,110.175 128.008,110.175 ; 126.415,120.758 126.415,121.963 ; 127,125.362 127,126.387 ; 127.046,71.726 131.564,71.726 ; 127.046,84.226 127.196,84.376 127.489,84.376 127.539,84.426 131.364,84.426 131.564,84.226 ; 127.046,96.726 131.564,96.726 ; 127.046,109.225 127.196,109.375 127.489,109.375 127.539,109.425 131.364,109.425 131.564,109.225 ; 127.774,119.829 127.799,119.854 128.485,119.854 128.735,120.104 128.737,120.104 ; 127.774,120.629 127.774,121.963 ; 128.877,80.364 128.877,81.66 ; 128.877,105.363 128.877,106.659 ; 128.986,67.864 128.986,69.16 ; 128.987,124.418 128.987,124.42 129,124.433 129,125.588 ; 129.016,92.824 129.016,94.119 ; 129.812,106.664 129.817,106.659 ; 130.757,77.51 132.1,77.51 ; 130.757,106.659 130.757,108.1 ; 130.782,90.01 132.044,90.01 132.098,90.064 132.1,90.064 ; 130.782,102.51 132.1,102.51 ; 130.782,115.01 132.1,115.01 ; 135.282,117.75 135.282,119.381 ; 137.706,117.75 138.73,117.75 ; 142.996,86.5 144.18,86.5 ; 146.975,80.47 147.947,80.47 ; 146.975,91.47 147.947,91.47 ; 146.975,102.47 147.947,102.47 ; 146.975,113.47 147.947,113.47 ; 147.947,82.663 148.897,82.663 149.847,82.663 ; 147.947,93.663 148.897,93.663 149.847,93.663 ; 147.947,104.663 148.897,104.663 149.847,104.663 ; 147.947,115.663 148.897,115.663 149.847,115.663 ; 149.847,80.47 151.55,80.47 ; 149.847,91.47 151.55,91.47 ; 149.847,102.47 151.55,102.47 ; 149.847,113.47 151.55,113.47 ; 155.243,42.175 155.93,42.175 156.63,42.175 157.33,42.175 ; 155.944,67.7 157.102,67.7 ; 156.986,80.47 158.039,80.47 ; 156.985,91.47 158.039,91.47 ; 156.985,102.47 158.039,102.47 ; 156.985,113.47 158.039,113.47 ; 157.902,67 157.902,67.7 ; 158.039,93.663 158.989,93.663 159.939,93.663 ; 158.989,104.663 159.939,104.663 ; 159.07,82.663 159.939,82.663 ; 159.939,80.47 161.642,80.47 ; 159.939,91.47 161.642,91.47 ; 159.939,102.47 161.642,102.47 ; 159.939,113.47 161.642,113.47 ; 173.1,51.366 173.1,52.617 173.1,52.642 ; 173.1,55.169 174.025,55.169 ; 173.1,55.969 173.1,56.944 ; 173.375,78.871 173.377,78.871 173.398,78.891 174.605,78.891 ; 173.375,79.821 173.375,81.593 ; 173.8,60.304 175.11,60.304 ; 173.8,66.528 175.11,66.528 ; 174.605,80.771 175.529,80.771 175.822,80.478 175.822,78.241 ; 175.11,58.45 175.11,59.504 ; 175.11,64.742 175.11,65.728 ; 175.538,82.06 176.355,82.06 ; 176.86,57.85 176.86,59.504 ; 176.86,60.304 176.86,61.872 ; 176.86,64.142 176.86,65.728 ; 176.86,66.528 176.86,68.115 ; 177.155,82.06 177.155,83.08
  Top Layer w0.55: 132.1,67.864 132.1,68.717 ; 132.1,80.364 132.1,81.217 ; 132.1,92.824 132.1,93.676 ; 132.1,105.363 132.1,106.215 ; 137.359,102.323 138.559,102.323 ; 138.134,95.123 139.189,95.123 ; 158.039,115.663 158.989,115.663 159.939,115.663 ; 173.256,114.85 174.4,114.85
  Top Layer w0.75: 101.636,100.693 103.172,100.693 ; 119.44,46.807 119.44,54.4 ; 121.963,114.483 121.963,115.609
  Top Layer w0.9: 114.36,54.4 114.36,61.7
  Top Layer w1: 40.1,108.42 44.32,108.42 ; 44.32,88.1 47,88.1 ; 44.32,95.72 47,95.72 ; 44.32,98.26 47,98.26 ; 44.32,100.8 47,100.8 ; 44.32,103.34 47,103.34 ; 44.32,105.88 47,105.88 ; 44.32,110.96 47,110.96 ; 44.32,113.5 47,113.5 ; 44.32,116.04 47,116.04 ; 44.32,118.58 47,118.58 ; 44.32,121.12 47,121.12 ; 44.32,123.66 47,123.66 ; 44.32,126.2 47,126.2 ; 44.32,128.74 v1(47,128.74) ; 44.32,131.28 v1(47,131.28) ; 51.47,78 51.47,82.451 ; 54.01,78 54.01,82.451 ; 54.01,102.07 54.01,105.648 56.782,108.42 63.7,108.42 ; 54.01,112.23 55.75,112.23 57.02,110.96 63.7,110.96 ; 56.55,78 56.55,82.451 ; 61.02,88.1 63.7,88.1 ; 61.02,90.64 63.7,90.64 ; 61.02,93.18 63.7,93.18 ; 61.02,95.72 63.7,95.72 ; 61.02,98.26 63.7,98.26 ; 61.02,100.8 63.7,100.8 ; 61.02,103.34 63.7,103.34 ; 61.02,113.5 63.7,113.5 ; 61.02,116.04 63.7,116.04 ; 61.02,126.2 63.7,126.2 ; 82.353,127.106 82.353,128.814 86.539,133 98.201,133 101.801,129.4 ; 87.261,122.22 88.336,122.22 ; 87.263,124 88.148,124 93.22,129.072 v1(93.22,130.153) v1(93.22,131.193) ; 90.192,59.85 93.966,59.85 ; 97.982,54.4 97.982,59.403 ; 98.04,61.73 98.04,61.128 98.482,60.687 ; 101.801,127.106 101.801,129.4 ; 106.957,124.14 107.098,124 107.857,124 110.163,124 ; 107.191,126.374 107.565,126 110.163,126 ; 111.585,124 113.088,124 114.128,124 115.168,124 ; 120.492,124.286 120.492,127.99 ; 132.987,127.106 132.987,129.4 ; 135.473,58.367 135.473,73.199 ; 137.83,124 142.367,124 ; 137.83,126 142.367,126 ; 143.789,124 146.363,124 146.907,124 147.45,124 147.993,124 ; 143.789,126 146.363,126 146.907,126 147.45,126 147.993,126 ; 149.85,125.022 149.85,126.347 150.463,126.96 152.975,126.96 153.525,126.96 154,126.96 ; 165.4,119.603 167.241,119.603 168.4,118.444 168.4,107.478 ; 171.004,72.578 175.402,72.578 179.5,68.48 179.5,59.065 179.5,54.134 179.5,49.202 ; 171.321,80.993 169.05,80.993 168.4,81.643 168.4,107.478 ; 172.278,107.478 168.4,107.478 ; 173.778,116.3 173.778,121.128 173.178,121.728 v1(172.725,122.18) v1(172.273,122.633) 165.505,129.4 132.987,129.4 ; 101.801,129.4 132.987,129.4
  Inner 1 w0.24: 28,36.72 28,39.81 52.87,64.68 87.03,64.68 91.214,68.864 93.77,68.864 93.77,72.2 81.432,84.538 81.432,87.775 79.93,89.276
  Inner 1 w0.254: 138.134,96.557 139.989,94.702 139.989,89.104
  Inner 1 w0.3: 47,95.72 50.86,99.58 65.3,99.58 66.34,100.62 66.34,111.3 73.395,118.355 76.3,118.355 ; 76.402,111.484 76.402,106.331 77.725,105.008 81.743,105.008
  Inner 1 w0.35: 41.522,83.02 43.652,80.89 70.44,80.89 73.329,83.779 73.329,86.563 73.329,92.818 76.449,95.938 ; 66.09,83.02 67.517,83.02 71.71,87.213 71.71,94.04 ; 66.09,85.56 68.186,85.56 70.489,87.863 70.489,94.717 71.71,95.938 ; 72.495,113.621 71.79,112.916 71.79,105.61 73.975,103.425 83.403,103.425 88.761,98.067 88.761,95.539 95,89.3 98.47,89.3 100.445,87.325 100.445,86.957 100.463,86.94 ; 80.203,102.482 94.215,88.47 98.45,88.47 99.589,87.331 99.589,86.951 99.6,86.94 ; 141.259,86.5 141.259,73.171 141.303,73.127 141.303,59.84
  Inner 1 w0.4: 84.843,85.033 87.511,87.701 88.685,87.701 ; 99.336,98.96 103.061,95.235 105.486,95.235 ; 120.424,76.56 122.694,78.83 132.1,78.83 ; 120.424,89.06 122.644,91.28 132.13,91.28 ; 120.424,101.56 120.424,103.016 121.477,104.068 131.823,104.068 132.071,103.82 132.1,103.82 ; 120.438,66.33 132.1,66.33 ; 125.896,72.676 126.887,72.676 128.237,71.326 129.974,71.326 130.866,70.435 ; 125.896,85.176 127.698,85.176 128.307,84.568 129.119,84.568 130.757,82.93 ; 125.896,97.676 127.618,97.676 128.368,96.926 129.151,96.926 130.896,95.181 130.896,95.152
  Inner 1 w0.5: 77.987,122.683 79.087,121.583 81.169,121.583 83.586,124 84.803,124 84.803,116.693 83.004,114.894 ; 78.025,109.336 78.025,109.915 83.003,114.893 ; 79.503,122.683 81.094,122.683 83.317,124.906 ; 96.553,102.994 96.553,97.742 101.389,92.907 103.606,92.907 ; 96.554,115.474 96.554,106.483 97.65,105.387 103.606,105.387 ; 96.85,81.761 96.85,81.763 97.1,82.013 97.1,87.188 96.85,87.438 96.85,87.44 ; 98.951,122.683 100.542,122.683 102.764,124.906 ; 99.336,111.434 99.336,109.109 100.706,107.739 105.506,107.739 ; 104.546,105.387 104.546,102.469 105.503,101.512 109,101.512 109.825,100.687 ; 105.506,105.387 106.236,104.657 107.341,104.657 107.891,105.207 109.06,105.207 ; 108.156,82.66 112.17,82.66 112.49,82.98 112.49,91.383 110.009,93.864 ; 108.753,94.13 109.811,95.188 ; 111.092,98.51 111.092,96.468 109.811,95.188 ; 112.817,95.188 109.811,95.188 ; 119.364,74.866 120.169,75.671 123.86,75.671 124.744,74.788 124.746,74.788 ; 119.364,87.366 119.366,87.366 119.873,87.873 123.888,87.873 124.746,87.016 ; 119.364,99.866 119.366,99.866 119.873,100.373 123.888,100.373 124.746,99.516 ; 119.363,112.519 119.366,112.519 120.017,113.17 123.59,113.17 124.746,112.015 ; 121.698,74.25 121.698,71.456 125.29,67.864 128.986,67.864 ; 121.963,87.016 121.963,83.531 125.131,80.364 128.877,80.364 ; 121.963,103.11 123.446,103.11 125.616,100.94 125.616,98.946 124.746,98.076 124.746,94.843 126.764,92.824 129.016,92.824 ; 121.963,115.609 123.073,115.609 125.896,112.787 125.896,107.059 127.592,105.363 128.877,105.363 ; 128.008,110.175 128.009,110.174 128.357,110.174 130.428,108.102 130.755,108.102 130.757,108.1 ; 130.137,122.683 131.728,122.683 133.95,124.906 ; 146.975,80.47 148.797,80.47 150.465,82.138 155.317,82.138 156.985,80.47 ; 146.975,102.47 148.797,102.47 150.465,104.138 155.317,104.138 156.985,102.47 ; 151.55,80.47 152.27,79.75 160.922,79.75 161.642,80.47 ; 151.55,91.47 152.27,90.75 160.922,90.75 161.642,91.47 ; 151.55,102.47 152.27,101.75 160.922,101.75 161.642,102.47 ; 151.55,113.47 152.27,112.75 160.922,112.75 161.642,113.47 ; 153.161,78.46 163.253,78.46 174.929,90.136 179.5,90.136 ; 153.161,89.46 163.253,89.46 170.92,89.46 174.136,92.676 179.5,92.676 ; 153.161,100.46 158.405,95.216 179.5,95.216 ; 153.161,111.46 163.253,111.46 176.957,97.756 179.5,97.756 ; 157.902,67 157.902,60.662 157.08,59.84 159.27,59.84 160.52,61.09 172.34,61.09 174.025,59.405 174.025,55.169
  Inner 1 w1: 40.1,100.8 40.242,100.8 41.512,102.07 54.01,102.07 ; 40.1,103.34 40,103.44 38,103.44 37.02,104.42 37.02,109.8 39.45,112.23 54.01,112.23 ; 40.1,105.88 40.242,105.88 41.512,104.61 59.75,104.61 61.02,103.34 ; 79.337,107.558 87.418,107.558 91.59,103.386 91.59,94.62 95.14,91.07 99.193,91.07 105.14,85.123 105.14,83.549 105.14,81.469 ; 88.336,122.22 88.97,122.22 89.221,122.471 89.221,124.498 91.304,126.581 102.641,126.581 106.795,122.427 111.515,122.427 113.088,124 ; 92.926,59.84 93.966,59.84 ; 93.976,59.84 105.14,59.84 ; 105.14,81.459 105.14,59.84 ; 113.088,124.01 115.168,124.01 ; 157.08,59.84 141.303,59.84 105.14,59.84
  Inner 4 w0.25: 117.75,86.34 117.75,107.801 121.963,112.015
  Inner 4 w0.254: 135.594,108.75 136.802,107.543 136.802,84.791 ; 143.7,114 144.563,114.863 152.298,114.863 153.161,114 ; 146.975,113.47 147.91,112.535 154.835,112.535 156.29,111.08 156.29,72.12 156.47,71.941 156.63,71.941 157.031,71.54 157.1,71.54 ; 156.985,113.47 160.84,109.615 160.84,91.132 160.853,91.119 160.853,74.376 157.902,71.425
  Inner 4 w0.3: 78.523,117.455 77.77,116.702 76.913,116.702 75.29,115.079 75.29,95.05 75.74,94.6 75.74,86.723 79.443,83.02 80.377,83.02 ; 96.878,93.152 93.647,89.92 93.647,82.471 96.307,79.811 97.9,79.811 ; 117.05,87.09 117.05,104.093 116.98,104.163 116.98,121.11 118.97,123.1 125.278,123.1 126.415,121.963 ; 134.24,114.38 134.245,114.375 134.245,88.115 134.25,88.11
  Inner 4 w0.35: 47,103.34 45.02,101.36 45.02,70.32 50.63,64.71 104.034,64.71 107.577,68.253 107.577,81.137 106.96,81.754 106.96,82.932 107.577,83.549 107.577,101.557 106.541,102.593 ; v1(47,128.74) 47.95,127.79 47.95,76.6 49.144,75.406 102.139,75.406 106.27,79.537 106.27,83.91
  Inner 4 w0.4: 95.41,121.963 95.41,109.623 96.554,108.479 96.554,105.666 98.58,103.64 98.58,93.163 101.45,90.293 101.45,85.711 ; 95.579,106.987 95.579,94.317 92.76,91.499 92.76,82.142 96.324,78.577 97.927,78.577 98.5,79.15 ; 118.53,85.62 118.53,96.082 121.963,99.516
  Inner 4 w0.5: 77.274,95.938 77.274,105.495 79.337,107.558 79.337,114.96 78.755,115.543 78.027,115.543 78.025,115.544 ; 79.503,124.906 81.726,122.683 83.317,122.683 ; 98.951,124.906 101.174,122.683 102.764,122.683 ; 106.541,113.174 108.42,115.053 108.42,120.12 106.957,121.583 106.957,124.14 ; 130.137,124.906 132.36,122.683 133.95,122.683 ; 146.363,126 146.907,126 147.45,126 147.993,126 159.825,126 170.76,115.065 170.76,84.208 173.375,81.593 ; v1(172.273,122.633) v1(172.725,122.18) 173.178,121.728 177.155,117.751 177.155,83.08
  Inner 4 w1: v1(109.6,130.99) 111.68,130.99 117.492,130.99 120.492,127.99 120.492,125.92
  Inner 2 w0.3: v1(47,131.28) 44.8,129.08 44.8,82.58 50.89,76.49 89.257,76.49 95.15,82.383
  Inner 2 w0.35: 74.954,85.013 81.677,85.013 83.12,83.57 87.5,83.57 ; 98.8,86.94 98.8,88.15 99.64,88.99 112.361,88.99 115.48,85.871 115.48,81.8 117.76,79.52 121.009,79.52 122.037,78.492 122.037,75.395 122.777,74.656
  Inner 2 w0.4: 98.04,61.73 98.04,66.958 98.29,67.208 98.29,71.998
  Inner 2 w0.5: 28,56.79 36.41,56.79 42.85,50.35 175.69,50.35 178.95,53.61 178.95,83.68 170.63,92 163.253,92 ; 61.02,98.26 87.19,98.26 89.5,95.95 89.5,92.828 92.138,90.19 112.656,90.19 116.52,86.326 116.52,83.42 118.496,81.444 124.471,81.444 128.405,77.51 132.1,77.51 ; 75.305,80.734 86.567,80.734 91.495,85.661 ; 76.402,111.484 82.319,111.484 85.641,114.806 85.641,125.162 84.803,126 ; 76.53,90.97 79.655,94.095 79.655,95.938 ; 97.439,80.96 97.437,80.96 96.534,80.057 96.534,77.861 99.65,74.745 99.65,68.518 105.719,62.45 156.954,62.45 173.375,78.871 ; 112.989,73.044 114.087,73.044 114.243,73.2 114.765,73.2 115.68,72.285 115.68,67.16 118.48,64.36 143.673,64.36 152.03,72.717 152.03,79.869 153.161,81
  Inner 3 w0.2: 100.8,79.15 108.098,79.15 109.028,80.08 112.99,80.08 118.53,85.62
  Inner 3 w0.25: 100.875,80.311 106.751,80.311 109.04,82.6 114.01,82.6 117.75,86.34
  Inner 3 w0.254: 77.778,81.834 78.96,81.834 79.197,82.071 79.197,83.837 79.573,84.213 88.118,84.213 89.11,83.221 89.11,77.27 90.03,76.35 114.25,76.35 118.369,80.469 126.471,80.469 127.871,79.069 131.08,79.069 136.802,84.791
  Inner 3 w0.3: 47,105.88 48.81,105.88 50.01,107.08 50.01,113.51 51.33,114.83 70.436,114.83 71.962,116.356 105.258,116.356 106.541,115.074 ; 61.02,90.64 59.31,90.64 57.17,92.78 57.17,98.04 58.92,99.79 88.79,99.79 89.51,100.51 89.51,104.39 94.409,109.289 108.591,109.289 112.742,113.44 130.53,113.44 132.1,115.01 ; 61.02,93.18 59.36,93.18 58.81,93.73 58.81,96.47 59.41,97.07 66.89,97.07 68.15,98.33 89.51,98.33 90.45,99.27 90.45,103.11 91.408,104.068 130.543,104.068 132.1,102.51 ; 76.3,118.355 76.34,118.316 120.08,118.316 120.235,118.16 132.631,118.16 138.257,112.535 163.795,112.535 164.58,111.75 164.58,101.787 163.253,100.46 ; 80.377,83.02 80.381,83.016 87.577,83.016 88.39,82.203 88.39,76.9 89.45,75.84 114.83,75.84 118.596,79.606 124.889,79.606 126.285,78.21 132.68,78.21 139.616,85.146 145.939,85.146 147.115,83.97 154.898,83.97 155.94,85.012 155.94,99.2 154.719,100.421 153.2,100.421 153.161,100.46 ; 80.42,87.46 81.317,86.563 86.001,86.563 86.703,85.861 89.06,85.861 89.875,86.676 93.647,86.676 95.09,88.12 134.24,88.12 134.25,88.11 ; 101.76,80.96 103.18,80.96 104.08,81.86 104.08,84.225 104.915,85.06 111.5,85.06 113.53,87.09 117.05,87.09 ; 111.67,103.496 122.938,92.229 152.738,92.229 152.967,92 153.161,92
  Inner 3 w0.35: 99.52,79.15 99.52,78.08 100.71,76.89 113.71,76.89 115.21,78.39 115.21,78.997 121.323,85.11 123.229,87.016
  Inner 3 w0.5: 28,76.86 38.41,76.86 64.92,50.35 151.25,50.35 167.51,66.61 167.51,92.85 166.19,94.17 162.41,94.17 161.642,94.938 161.642,101.002 163.154,102.514 163.154,102.901 163.253,103 ; 28,117 34.73,117 36.16,115.57 36.16,100.14 46.91,89.39 72.009,89.39 72.501,88.898 75.74,88.898 77.179,87.46 80.42,87.46 ; 47,98.26 52.77,98.26 56.55,102.04 67.95,102.04 69.53,103.62 85.212,103.62 87.73,101.103 ; 61.02,95.72 66.76,95.72 69.642,92.838 88.932,92.838 91.25,90.52 117.33,90.52 118.437,91.627 120.365,91.627 120.959,91.033 127.546,91.033 128.515,90.064 132.1,90.064 ; 77.18,89.895 77.182,89.895 78.357,91.07 83.361,91.07 85.518,88.913 102.298,88.913 103.049,89.664 119.639,89.664 120.109,90.135 121.329,90.135 121.8,89.664 123.384,89.664 123.988,89.06 137.63,89.06 138.76,90.19 145.774,90.19 146.504,89.46 153.161,89.46
  Bottom Layer w0.2: 47,110.96 47.94,110.02 47.94,65.1 57.27,55.77 166.46,55.77 ; 47,116.04 48.72,114.32 48.72,66.55 58.571,56.699 165.569,56.699 165.8,56.93 165.84,56.93 ; 47,118.58 49.48,116.1 49.48,67.77 59.65,57.6 165.107,57.6 165.277,57.77 165.36,57.77 ; 47,121.12 50.22,117.9 50.22,80.671 50.22,68.52 60.441,58.299 164.389,58.299 164.86,58.77 ; 47,123.66 52.69,117.97 52.69,67.67 61.335,59.025 163.605,59.025 164.2,59.621 ; 78.449,89.895 75.9,87.346 75.9,79.08 91.67,63.31 108.78,63.31 110.155,61.935 159.585,61.935 170.164,72.514 173.183,72.514 ; 110.4,83.87 115.48,83.87 116.909,82.441 116.909,68.091 119.82,65.18 147.938,65.18 152.198,69.44 155,69.44 ; 110.4,86.41 108.69,84.7 108.69,77.03 109.58,76.14 113.74,76.14 115.21,74.67 115.21,67.63 118.92,63.92 148.57,63.92 152.9,68.25
  Bottom Layer w0.254: 146.975,80.47 146.975,73.965 148.41,72.53 154.571,72.53 159.401,67.7 160.577,67.7 ; 146.975,91.47 149.217,91.47 151.51,93.763 156.889,93.763 159.939,90.713 159.939,70.3 160.539,69.7 ; 153.161,103 153.367,103 153.875,103.508 162.539,103.508 163.047,103 163.253,103 ; 156.985,91.47 156.985,82.684 159.33,80.339 159.33,70.096 160.539,68.888 ; 156.985,102.47 160.539,98.917 160.539,70.634 160.577,70.596
  Bottom Layer w0.3: 28,96.93 32.259,96.93 34.76,99.431 34.76,119.174 40.516,124.93 57.508,124.93 66.082,116.356 160.897,116.356 163.253,114 ; 76.53,82.466 81.096,82.466 87.543,88.913 90.243,88.913 91.52,90.19 101.11,90.19 101.636,89.664 117.344,89.664 119.909,92.229 144.036,92.229 145.924,94.117 145.924,109.377 148.007,111.46 153.161,111.46 ; 77.178,83.779 81.024,83.779 81.978,84.732 81.978,88.705 83.361,90.088 87.086,90.088 88.068,91.07 102.014,91.07 102.564,90.52 116.58,90.52 119.737,93.676 130.734,93.676 136,98.942 136,102.414 139.009,105.423 141.259,105.423
  Bottom Layer w0.35: 73.65,68.14 73.65,83.21 74.129,83.689 74.129,85.913
  Bottom Layer w0.4: 61.02,116.04 59.47,114.49 59.47,92.57 60.278,91.762 84.397,91.762 84.821,91.338 86.3,91.338
  Bottom Layer w0.5: 91.495,85.661 88.47,82.636 88.47,78.1 90.9,75.67 101.24,75.67 102.113,74.797 102.113,73.806 102.115,73.805
  Bottom Layer w1: 61.63,78 71.49,68.14 73.65,68.14 81.94,59.85 93.966,59.85
  other v1: 86.73,128.06 87.77,128.06 88.81,128.07 146.363,130.892 146.907,130.892 147.45,130.892 147.993,130.892 110.64,131 111.68,131

## Polygon pours and split planes (outlines as drawn)
no net on Power (split plane): 152.023,57.197 76.602,57.197 76.602,68.19 76.602,91.96 76.602,97.763 85.758,97.763 85.758,62.45 85.766,62.385 85.792,62.324 85.832,62.272 85.884,62.232 85.945,62.206 86.01,62.198 145.7,62.198 145.765,62.206 145.826,62.232 145.878,62.272 145.918,62.324 145.944,62.385 145.952,62.45 145.952,126.96 145.944,127.025 145.918,127.086 145.878,127.138 145.826,127.178 145.765,127.204 145.7,127.212 126.098,127.212 126.032,127.204 125.972,127.178 125.919,127.138 125.879,127.086 125.854,127.025 125.846,126.96 125.846,123.116 118.533,123.116 118.526,123.121 118.465,123.146 118.4,123.155 111.126,123.155 111.126,124.808 119.38,124.808 119.445,124.816 119.506,124.842 119.558,124.882 119.598,124.934 119.623,124.995 119.632,125.06 119.632,129.148 152.023,129.148
no net on Power (split plane): 170 vertices, not listed, extent 22.002,22.002 181.998,131.998
no net on Power (split plane): 94.112,92.076 94.12,92.011 94.145,91.95 94.185,91.898 94.238,91.858 94.299,91.833 94.364,91.824 94.369,91.825 94.374,91.824 114.9,91.824 114.965,91.833 115.026,91.858 115.078,91.898 115.118,91.95 115.144,92.011 115.152,92.076 115.152,102.81 115.144,102.875 115.118,102.936 115.078,102.988 115.026,103.028 114.965,103.054 114.9,103.062 107.593,103.062 107.593,122.65 118.148,122.65 118.148,122.23 118.148,88.125 90.587,88.125 90.587,126.708 94.112,126.708
no net on Power (split plane): 119.127,125.312 104.272,125.312 104.206,125.304 104.145,125.278 104.093,125.238 104.053,125.186 104.028,125.125 104.019,125.06 104.019,114.124 104.019,96.809 104.028,96.744 104.053,96.683 104.093,96.631 104.145,96.591 104.206,96.566 104.272,96.557 107.341,96.557 107.406,96.566 107.467,96.591 107.519,96.631 107.559,96.683 107.584,96.744 107.593,96.809 107.593,102.558 114.648,102.558 114.648,92.329 94.616,92.329 94.616,126.708 119.127,126.708
no net on Power (split plane): 151.994,129.652 119.38,129.652 119.314,129.644 119.253,129.618 119.201,129.578 119.161,129.526 119.136,129.465 119.127,129.4 119.127,127.212 90.335,127.212 90.27,127.204 90.209,127.178 90.156,127.138 90.116,127.086 90.091,127.025 90.083,126.96 90.083,87.873 90.091,87.808 90.116,87.747 90.156,87.695 90.209,87.655 90.27,87.63 90.335,87.621 118.148,87.621 118.148,62.702 86.262,62.702 86.262,98.015 86.262,126.96 86.262,129.148 113.146,129.148 113.211,129.156 113.272,129.182 113.324,129.222 113.364,129.274 113.389,129.335 113.398,129.4 113.398,131.998 151.994,131.998
no net on Power (split plane): 122.977,62.702 118.652,62.702 118.652,122.23 118.652,122.612 122.977,122.612
no net on Power (split plane): 141.528,123.332 134.25,123.332 134.185,123.324 134.124,123.298 134.072,123.258 134.032,123.206 134.006,123.145 133.998,123.08 133.998,72.403 129.776,72.403 129.776,124.658 141.528,124.658
no net on Power (split plane): 145.448,62.702 123.481,62.702 123.481,122.612 126.098,122.612 126.163,122.62 126.224,122.645 126.276,122.686 126.316,122.738 126.341,122.799 126.35,122.864 126.35,126.708 145.448,126.708
no net on Power (split plane): 110.622,123.155 107.341,123.155 107.275,123.146 107.215,123.121 107.162,123.081 107.122,123.029 107.097,122.968 107.088,122.903 107.088,110.801 107.088,102.81 107.088,97.061 104.524,97.061 104.524,114.124 104.524,124.808 110.622,124.808
no net on Power (split plane): 111.541,80.493 95.279,80.493 95.279,84.871 111.541,84.871
no net on Power (split plane): 136.444,74.162 134.502,74.162 134.502,122.828 136.444,122.828
GND on Ground (split plane): 173.498,128.5 173.498,128.493 173.507,128.198 173.534,127.897 173.58,127.598 173.643,127.303 173.724,127.012 173.823,126.726 173.938,126.447 174.071,126.175 174.219,125.912 174.383,125.658 174.562,125.415 174.756,125.183 174.963,124.963 175.183,124.756 175.415,124.562 175.658,124.383 175.912,124.219 176.175,124.071 176.447,123.938 176.726,123.823 177.012,123.724 177.303,123.643 177.598,123.58 177.897,123.534 178.198,123.507 178.493,123.498 178.5,123.498 181.998,123.498 181.998,30.502 178.5,30.502 178.493,30.502 178.198,30.493 177.897,30.466 177.598,30.42 177.303,30.357 177.012,30.276 176.726,30.177 176.447,30.062 176.175,29.929 175.912,29.781 175.658,29.617 175.415,29.438 175.183,29.244 174.963,29.037 174.756,28.817 174.562,28.585 174.383,28.342 174.219,28.088 174.071,27.825 173.938,27.553 173.823,27.274 173.724,26.988 173.643,26.697 173.58,26.402 173.534,26.103 173.507,25.802 173.498,25.507 173.498,25.5 173.498,22.002 30.502,22.002 30.502,25.5 30.502,25.507 30.493,25.802 30.466,26.103 30.42,26.402 30.357,26.697 30.276,26.988 30.177,27.274 30.062,27.553 29.929,27.825 29.781,28.088 29.617,28.342 29.438,28.585 29.244,28.817 29.037,29.037 28.817,29.244 28.585,29.438 28.342,29.617 28.088,29.781 27.825,29.929 27.553,30.062 27.274,30.177 26.988,30.276 26.697,30.357 26.402,30.42 26.103,30.466 25.802,30.493 25.507,30.502 25.5,30.502 22.002,30.502 22.002,123.498 25.5,123.498 25.507,123.498 25.802,123.507 26.103,123.534 26.402,123.58 26.697,123.643 26.988,123.724 27.274,123.823 27.553,123.938 27.825,124.071 28.088,124.219 28.342,124.383 28.585,124.562 28.817,124.756 29.037,124.963 29.244,125.183 29.438,125.415 29.617,125.658 29.781,125.912 29.929,126.175 30.062,126.447 30.177,126.726 30.276,127.012 30.357,127.303 30.42,127.598 30.466,127.897 30.493,128.198 30.502,128.493 30.502,128.5 30.502,131.998 108.079,131.998 108.079,129.4 108.087,129.335 108.113,129.274 108.153,129.222 108.205,129.182 108.266,129.156 108.331,129.148 157.727,129.148 157.792,129.156 157.801,129.16 157.81,129.156 157.875,129.148 158.021,129.148 158.087,129.156 158.147,129.182 158.2,129.222 158.24,129.274 158.265,129.335 158.274,129.4 158.274,131.998 173.498,131.998
no net on Ground (split plane): 157.769,129.647 157.727,129.652 108.583,129.652 108.583,131.998 157.769,131.998

## Other copper
Top Layer:
  drawing of 240 lines, arcs and shapes, not listed
Inner 1:
  region: 111.159,96.55 112.438,95.27 112.438,95.109 110.059,95.109 110.009,95.159
  region: 146.12,131.72 145.891,131.491 145.891,125.799 146.2,125.49 148.27,125.49 148.52,125.74 148.52,131.51 148.31,131.72
Inner 2:
  region: 75.31,80.99 74.87,81.43 74.39,81.43 74.34,81.38 74.34,80.13 74.4,80.07 74.782,80.07 75.202,80.49 75.59,80.49
Power (plane layer: these items are gaps in the copper):
  lines w0.254: 95.15,80.363 111.67,80.363 111.67,85 95.15,85 95.15,80.363
  lines w0.5: 86.01,98.015 76.35,98.015 76.35,91.96 76.35,68.19 76.35,56.945 152.275,56.945 152.275,129.4 ; 86.01,126.96 86.01,129.336 86.074,129.4 87.199,129.4 ; 86.01,127.611 86.01,62.45 118.4,62.45 ; 86.01,129.4 113.146,129.4 113.146,134.22 113.25,134.22 ; 94.364,92.076 94.364,126.96 ; 94.374,92.076 114.9,92.076 114.9,102.81 107.341,102.81 107.341,110.801 ; 108.324,122.903 118.4,122.903 ; 118.4,87.873 90.335,87.873 90.335,126.96 119.38,126.96 ; 123.229,122.864 123.229,62.45 ; 134.25,73.91 136.696,73.91 136.696,123.08 ; 152.204,129.4 152.275,129.4 ; 152.239,129.4 152.246,129.4 152.246,134 ; 110.874,125.06 104.272,125.06 104.272,114.124 104.272,96.809 107.341,96.809 107.341,122.903 110.874,122.903 110.874,125.06 ; 110.874,125.06 119.38,125.06 119.38,129.4 152.275,129.4 ; 118.4,62.45 123.229,62.45 ; 118.4,62.45 118.4,122.23 118.4,122.864 126.098,122.864 126.098,126.96 145.7,126.96 145.7,62.45 134.964,62.45 123.229,62.45 ; 129.524,72.151 134.25,72.151 134.25,123.08 141.78,123.08 141.78,124.91 129.524,124.91 129.524,72.151
Ground (plane layer: these items are gaps in the copper):
  lines w0.5: 108.331,134 108.331,129.4 157.727,129.4 ; 157.875,129.4 158.021,129.4 158.021,134

## Silkscreen, mask and mechanical layers (free items; w line width, h text height)
Board Shape:
  the board outline again, w0.254